# EAGLE board RedBoard-Artemis-Nano-Panel (EAGLE 9.4.2), part 1 of 7
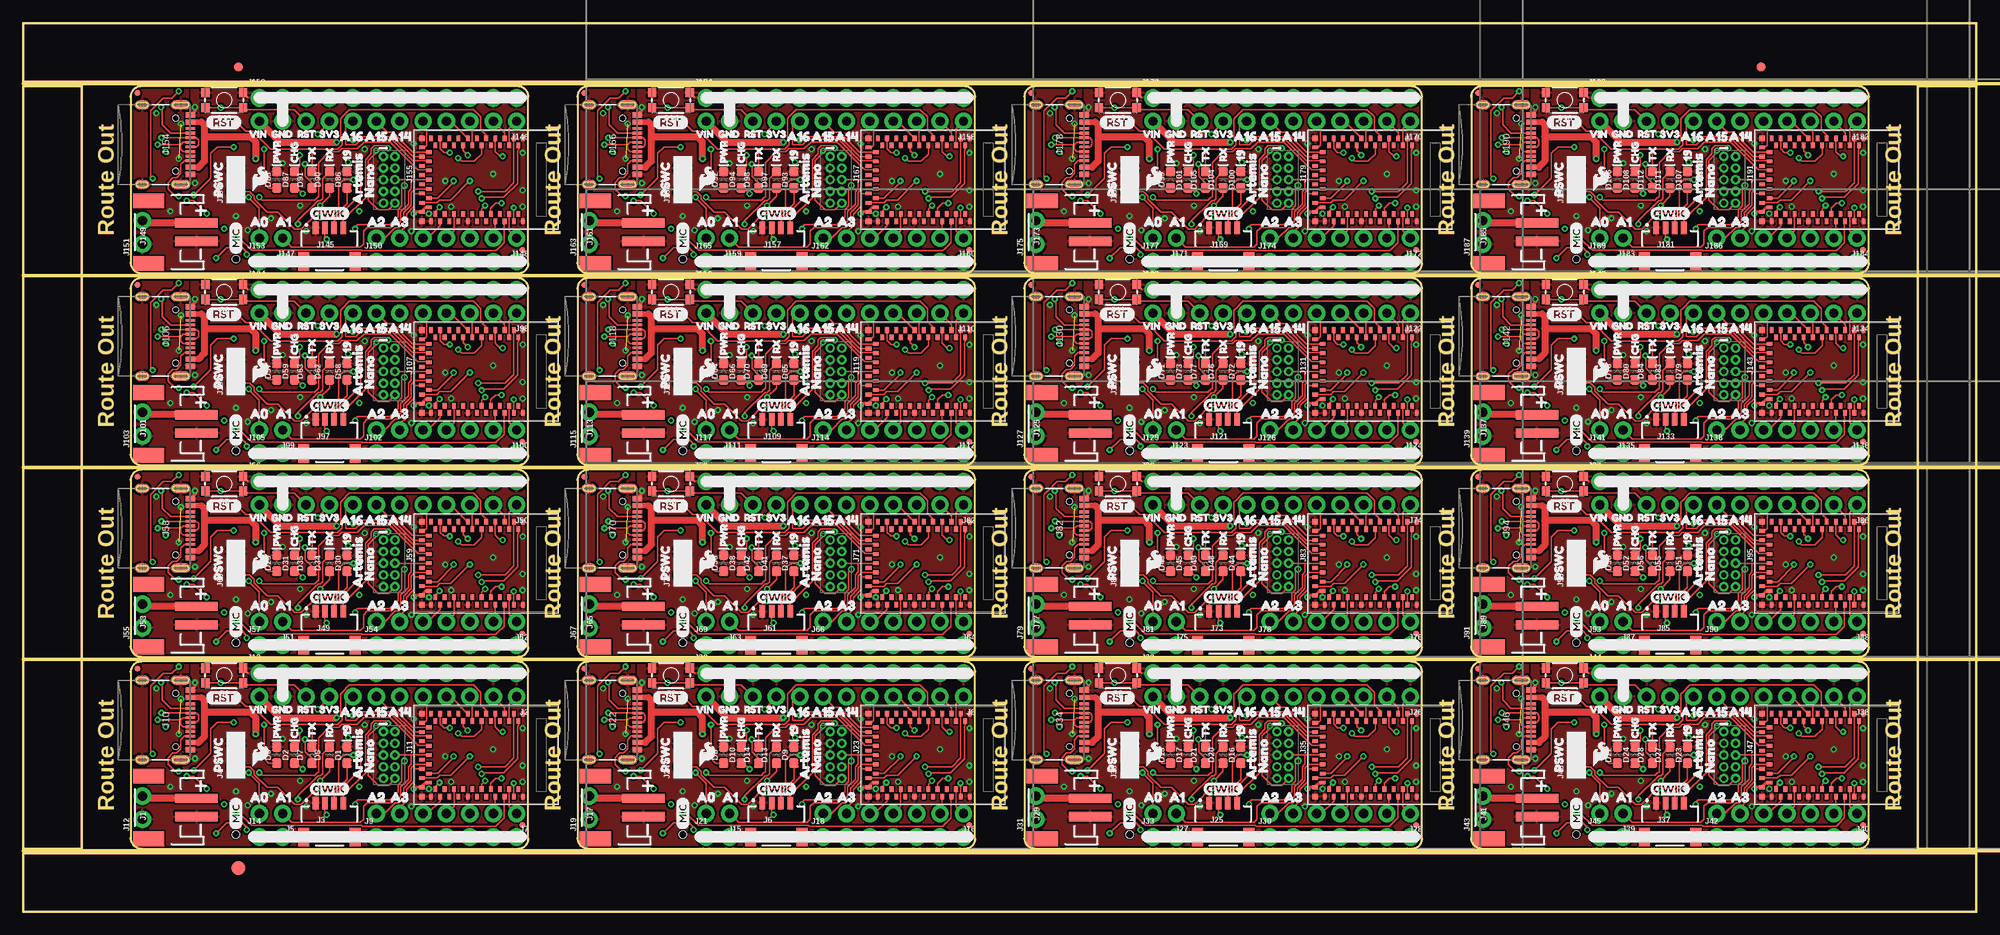
[diagram p0: board, top side]
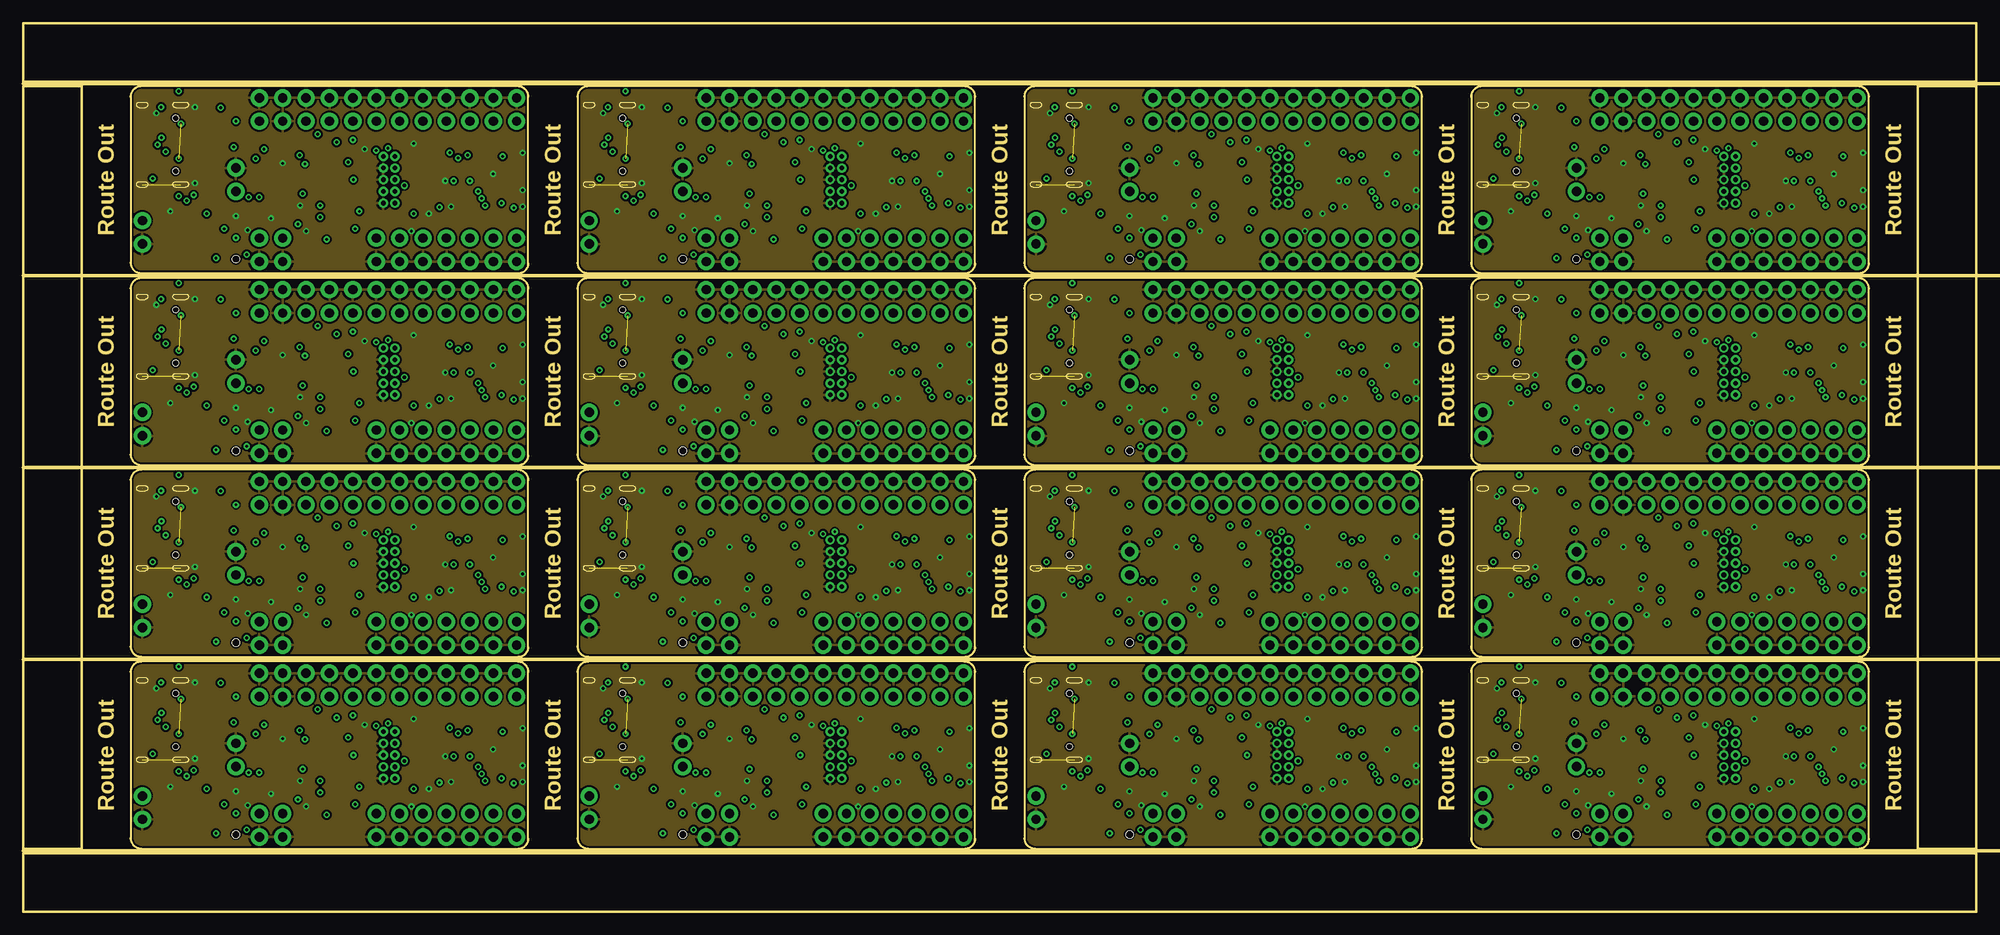
[diagram p1: board, inner layer Route2]
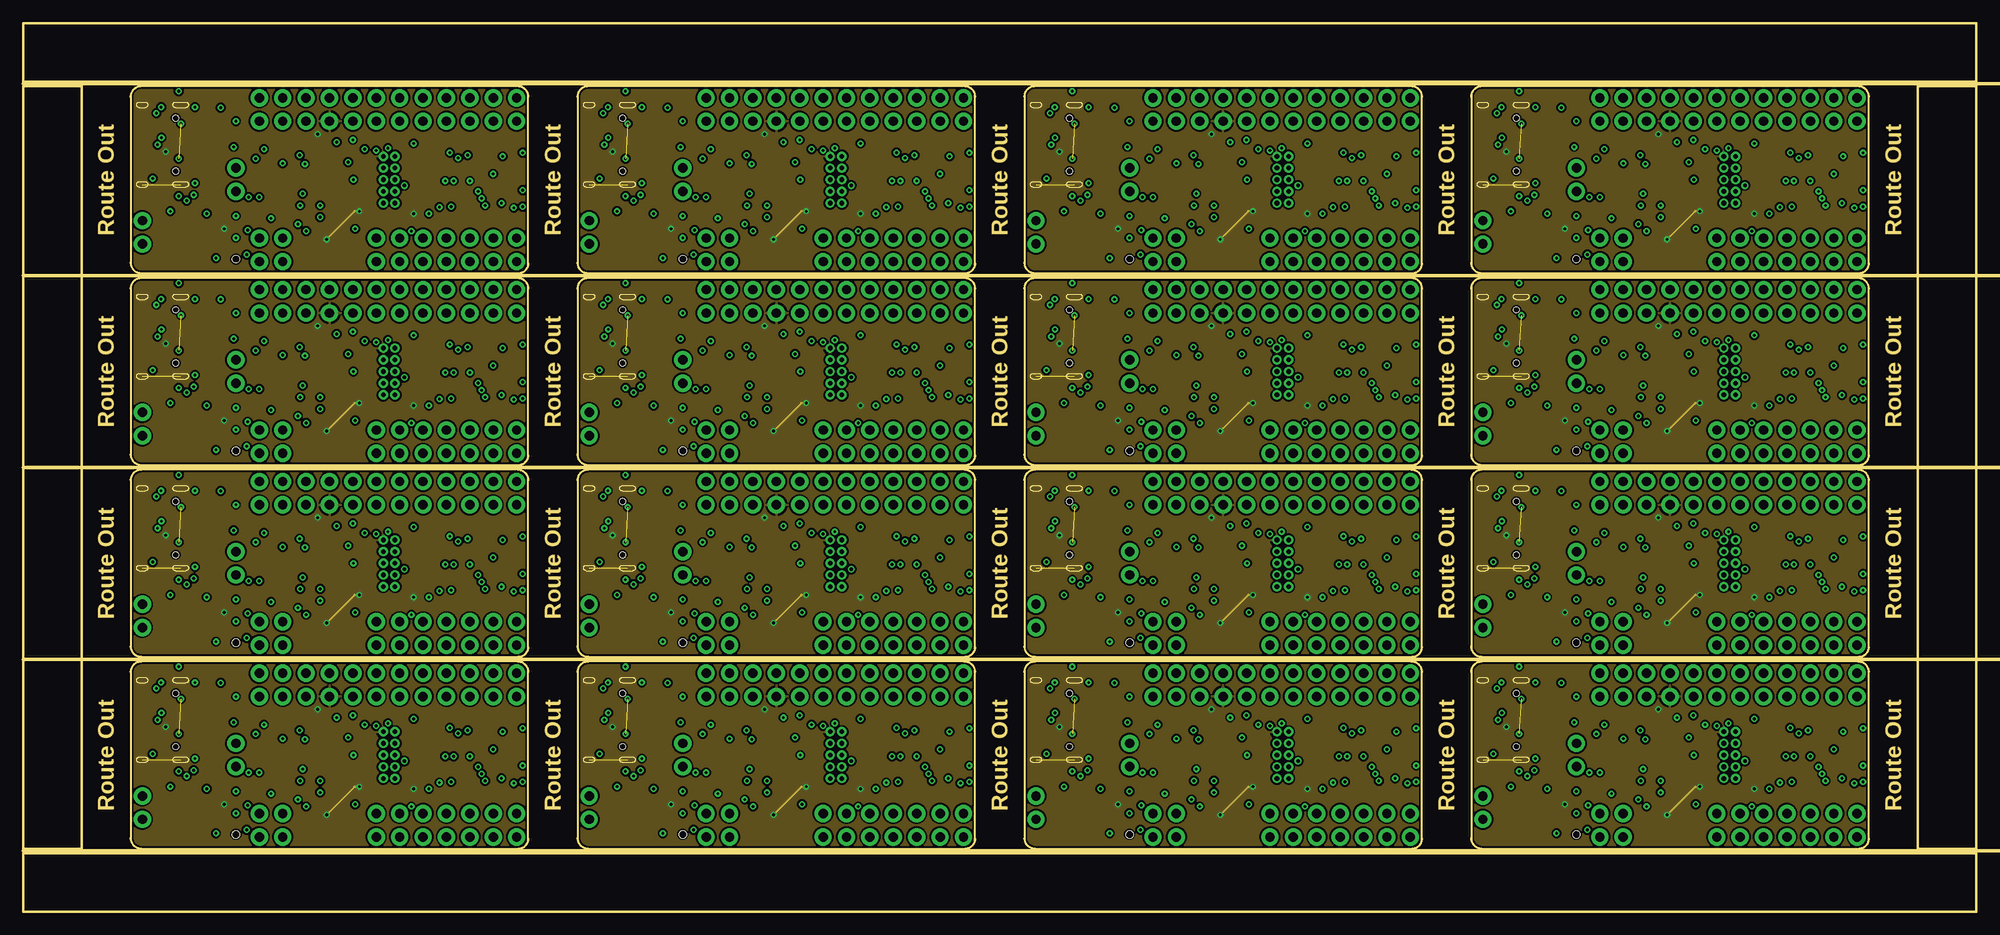
[diagram p2: board, inner layer Route15]
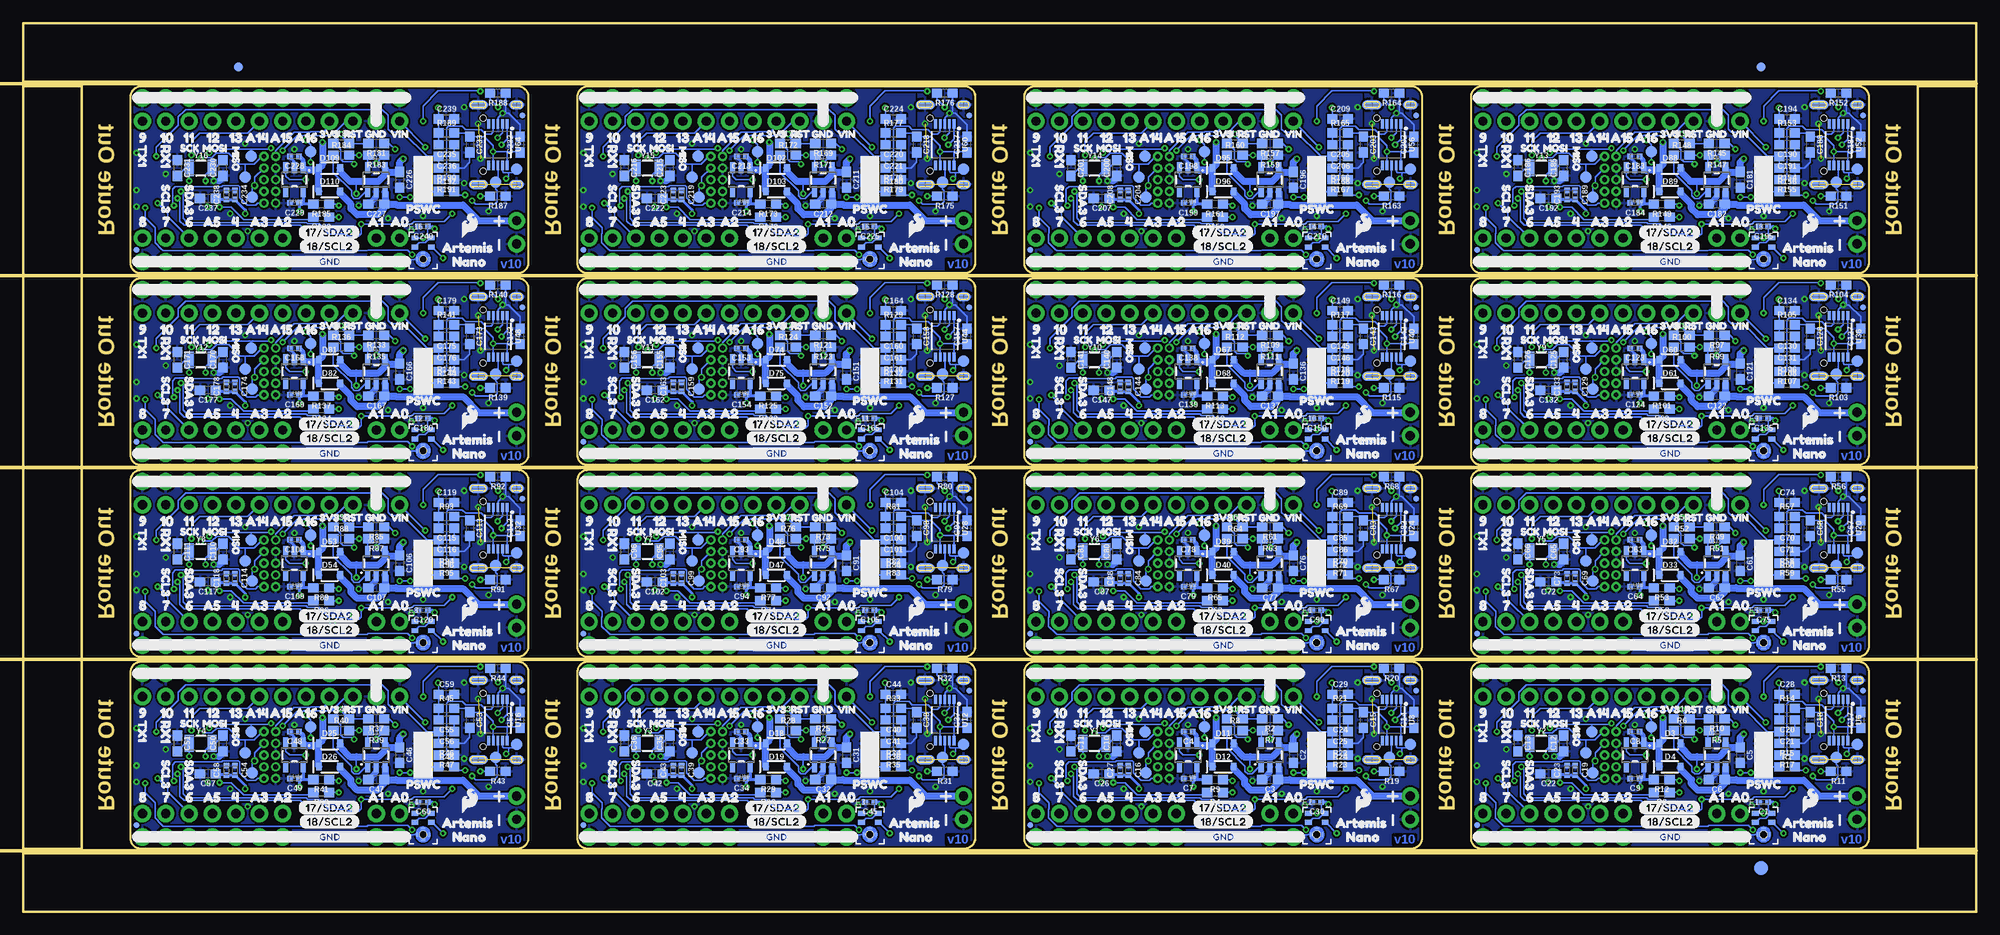
[diagram p3: board, bottom side, seen from below]

Size 212.09 x 96.52 mm. Coordinates in mm from the lower left corner, seen from the top.
Outline: 53.79,6.86 arc90 54.86,7.93 54.86,26.01 arc90 53.7,27.18 12.85,27.18 arc90 11.68,26.01 11.68,8.02 arc90 12.85,6.86 53.79,6.86
Outline: 102.3,6.86 arc90 103.38,7.93 103.38,26.01 arc90 102.21,27.18 61.36,27.18 arc90 60.2,26.01 60.2,8.02 arc90 61.36,6.86 102.3,6.86
Outline: 150.82,6.86 arc90 151.89,7.93 151.89,26.01 arc90 150.73,27.18 109.88,27.18 arc90 108.71,26.01 108.71,8.02 arc90 109.88,6.86 150.82,6.86
Outline: 199.33,6.86 arc90 200.41,7.93 200.41,26.01 arc90 199.24,27.18 158.39,27.18 arc90 157.23,26.01 157.23,8.02 arc90 158.39,6.86 199.33,6.86
Outline: 53.79,27.69 arc90 54.86,28.76 54.86,46.84 arc90 53.7,48.01 12.85,48.01 arc90 11.68,46.84 11.68,28.85 arc90 12.85,27.69 53.79,27.69
Outline: 102.3,27.69 arc90 103.38,28.76 103.38,46.84 arc90 102.21,48.01 61.36,48.01 arc90 60.2,46.84 60.2,28.85 arc90 61.36,27.69 102.3,27.69
Outline: 150.82,27.69 arc90 151.89,28.76 151.89,46.84 arc90 150.73,48.01 109.88,48.01 arc90 108.71,46.84 108.71,28.85 arc90 109.88,27.69 150.82,27.69
Outline: 199.33,27.69 arc90 200.41,28.76 200.41,46.84 arc90 199.24,48.01 158.39,48.01 arc90 157.23,46.84 157.23,28.85 arc90 158.39,27.69 199.33,27.69
Outline: 53.79,48.51 arc90 54.86,49.59 54.86,67.67 arc90 53.7,68.83 12.85,68.83 arc90 11.68,67.67 11.68,49.68 arc90 12.85,48.51 53.79,48.51
Outline: 102.3,48.51 arc90 103.38,49.59 103.38,67.67 arc90 102.21,68.83 61.36,68.83 arc90 60.2,67.67 60.2,49.68 arc90 61.36,48.51 102.3,48.51
Outline: 150.82,48.51 arc90 151.89,49.59 151.89,67.67 arc90 150.73,68.83 109.88,68.83 arc90 108.71,67.67 108.71,49.68 arc90 109.88,48.51 150.82,48.51
Outline: 199.33,48.51 arc90 200.41,49.59 200.41,67.67 arc90 199.24,68.83 158.39,68.83 arc90 157.23,67.67 157.23,49.68 arc90 158.39,48.51 199.33,48.51
Outline: 53.79,69.34 arc90 54.86,70.42 54.86,88.5 arc90 53.7,89.66 12.85,89.66 arc90 11.68,88.5 11.68,70.51 arc90 12.85,69.34 53.79,69.34
Outline: 102.3,69.34 arc90 103.38,70.42 103.38,88.5 arc90 102.21,89.66 61.36,89.66 arc90 60.2,88.5 60.2,70.51 arc90 61.36,69.34 102.3,69.34
Outline: 150.82,69.34 arc90 151.89,70.42 151.89,88.5 arc90 150.73,89.66 109.88,89.66 arc90 108.71,88.5 108.71,70.51 arc90 109.88,69.34 150.82,69.34
Outline: 199.33,69.34 arc90 200.41,70.42 200.41,88.5 arc90 199.24,89.66 158.39,89.66 arc90 157.23,88.5 157.23,70.51 arc90 158.39,69.34 199.33,69.34
Outline: 0,6.35 212.09,6.35 212.09,0 0,0 0,6.35
Outline: 205.74,89.66 212.09,89.66 212.09,6.86 205.74,6.86 205.74,89.66
Outline: 0,96.52 212.09,96.52 212.09,90.17 0,90.17 0,96.52
Outline: 0,89.66 6.35,89.66 6.35,6.86 0,6.86 0,89.66
Copper layers (1*2*15*16): Top 0.035559375mm / dielectric 0.47751875mm / Route2 0.035559375mm / dielectric 0.47751875mm / Route15 0.035559375mm / dielectric 0.47751875mm / Bottom 0.035559375mm
Design rules "SparkFun-4-layer-TIGHT": minimum track width 7mil, minimum drill 15mil, track to track 7mil, track to pad 7mil, pad to pad 7mil, via to via 7mil, smd to smd 7mil, copper to edge 7mil, drill to drill 7mil, minimum pad ring 7mil, minimum via ring 7mil, stop-mask expansion 4mil, vias tented up to drill 25mil, thermal gap 10mil
Net classes: 0 default: width 0 mm, drill 0 mm; 1 power: width 0.762 mm
Milling: 5 lines

## Footprints (pad centres in the part's own frame; a part is rotated, then mirrored left to right if it is on the bottom)
0402-TIGHT = smd 0.6 x 0.6: 1 -0.5,0; 2 0.5,0
0603 = smd 1.1 x 1: 1 -0.85,0; 2 0.85,0
LED-0603 = smd 1 x 1: A -0.877,0; C 0.877,0
SOD-323 = smd 0.63 x 0.83: A 1.15,0; C -1.15,0
SPH0641LM4H-1_MICROPHONE = smd 0.725 x 0.522: 1 -0.9,1.3; 2 -0.9,0.3; 4 0.9,0.3; 5 0.9,1.3 | smd 0.5 x 0.2: 3 0,-1.65; 8 0,-0.35 | smd 0.2 x 0.5: 6 -0.65,-1; 7 0.65,-1 | hole 0.8: 0,-1
FIDUCIAL-1X2 = smd 1 x 1: 1 0,0
FIDUCIAL-1.5X3 = smd 1.5 x 1.5: 1 0,0
FIDUCIAL-MICRO = smd 0.635 x 0.635: 1 0,0
JST-2-SMD = smd 1 x 4.6: 1 -1,-3.7; 2 1,-3.7 | smd 1.6 x 3.4: NC1 -3.4,1.5; NC2 3.4,1.5
1X12_NO_SILK = drill 1.016 pad 1.88: 1 0,0; 2 2.54,0; 3 5.08,0; 4 7.62,0; 5 10.16,0; 6 12.7,0; 7 15.24,0; 8 17.78,0; 9 20.32,0; 10 22.86,0; 11 25.4,0; 12 27.94,0
JST04_1MM_RA = smd 0.6 x 1.35: 1 -1.5,0; 2 -0.5,0; 3 0.5,0; 4 1.5,0 | smd 1.2 x 2: NC1 2.8,-3.675; NC2 -2.8,-3.675
1X02_NO_SILK = drill 1.016 pad 1.88: 1 0,0; 2 2.54,0
1X07_NO_SILK = drill 1.016 pad 1.88: 1 0,0; 2 2.54,0; 3 5.08,0; 4 7.62,0; 5 10.16,0; 6 12.7,0; 7 15.24,0
USB-C-16P-4LAYER-ISOLATED = smd 0.3 x 1.016: A5 -1.25,0.154; A6 -0.25,0.154; A7 0.25,0.154; A8 1.25,0.154; B5 1.75,0.154; B6 0.75,0.154; B7 -0.75,0.154; B8 -1.75,0.154 | smd 0.6 x 1.016: GND -3.225,0.154; GND2 3.225,0.154 | smd 1 x 2.1: SHLD1 -4.32,-0.915; SHLD2 4.32,-0.915 | smd 1 x 2.1 bottom: SHLD3 -4.32,-0.915; SHLD4 4.32,-0.915 | smd 1 x 1.6: SHLD5 -4.32,-5.095; SHLD8 4.32,-5.095 | smd 1 x 1.6 bottom: SHLD6 -4.32,-5.095; SHLD7 4.32,-5.095 | smd 0.55 x 1.016: VBUS1 -2.45,0.154; VBUS2 2.45,0.154 | hole 0.65: -2.89,-1.445; 2.89,-1.445
2X5-PTH-1.27MM-NO_SILK = drill 0.508 pad 1: 1 -2.54,-0.635; 2 -2.54,0.635; 3 -1.27,-0.635; 4 -1.27,0.635; 5 0,-0.635; 6 0,0.635; 7 1.27,-0.635; 8 1.27,0.635; 9 2.54,-0.635; 10 2.54,0.635
TACTILE_SWITCH_SMD_4.6X2.8MM = smd 0.9 x 1: 1 -2.05,-0.8; 2 2.05,-0.8; 3 2.05,0.8; 4 -2.05,0.8
PAD.03X.05 = smd 1.27 x 1.27: P$1 0,0
ARTEMIS_FP = smd 0.4 x 0.6: AD16 -4,-3.7; BOOT 1.5,4.5; D0 0.5,-4.5; D1 -0.5,-4.5; D2 -1,-3.7; D3 2,-3.7; D7 -1.5,4.5; D8 -0.5,4.5; D9 2,3.7; D10 1,3.7; D14 -5,3.7; D17 -3.5,-4.5; D36 2.5,-4.5; D38 3,-3.7; D40 2.5,4.5; D41 -2.5,-4.5; GND@1 4.5,4.5; GND@39 -5.5,-4.5; GND@47 -1.5,-4.5; GND@59 4.5,-4.5; RXI-0 3.5,4.5; SWDCK 4,3.7; SWDIO 0,3.7; TXO-0 0.5,4.5; ~AD31 -3,-3.7; ~AD35 -2,3.7; ~D4 -2.5,4.5; ~D5 -1,3.7; ~D18 -4.5,-4.5; ~D19 -5,-3.7; ~D22 -3.5,4.5; ~D23 -4,3.7; ~D24 -3,3.7; ~D27 -4.5,4.5; ~D28 -5.5,4.5; ~D37 3.5,-4.5; ~D39 3,3.7; ~D42 1.5,-4.5; ~D43 1,-3.7; ~D44 4,-3.7; ~D45 -2,-3.7; ~RST 0,-3.7 | smd 0.6 x 0.4: AD34 -6.5,-0.5; D15 -6.5,0.5; VDD@36 -5.7,-3; VDD@37 -6.5,-3.5; XI -6.5,-2.5; XO -5.7,-2; ~AD11 -5.7,-1; ~AD12 -5.7,2; ~AD13 -5.7,1; ~AD29 -6.5,-1.5; ~AD32 -5.7,3; ~AD33/SWO -5.7,0; ~D6 -6.5,3.5; ~D25 -6.5,2.5; ~D26 -6.5,1.5 | smd 0.6 x 0.6: GND@22 -6.5,4.5; GND@38 -6.5,-4.5
SOT23-5 = smd 0.55 x 1.2: 1 -0.95,-1.3; 2 0,-1.3; 3 0.95,-1.3; 4 0.95,1.3; 5 -0.95,1.3
MSOP10 = smd 1 x 0.3: 1 -2.25,1; 2 -2.25,0.5; 3 -2.25,0; 4 -2.25,-0.5; 5 -2.25,-1; 6 2.25,-1; 7 2.25,-0.5; 8 2.25,0; 9 2.25,0.5; 10 2.25,1
CRYSTAL-SMD-3.2X1.5MM = smd 1 x 1.8: P$1 -1.25,0; P$2 1.25,0

## Placement (x,y rotation side)
C1  0.1uF  [0402-TIGHT]  23.11,11.94 180 bottom
C2  4.7uF  [0603]  74.17,17.02 270 bottom
C3  4.7uF  [0603]  76.71,14.35 180 bottom
C4  1.0uF  [0402-TIGHT]  85.6,19.56 180 bottom
C5  4.7uF  [0603]  25.65,17.02 270 bottom
C6  4.7uF  [0603]  28.19,14.35 180 bottom
C7  1.0uF  [0402-TIGHT]  85.6,14.48 180 bottom
C8  1.0uF  [0402-TIGHT]  37.08,19.56 180 bottom
C9  1.0uF  [0402-TIGHT]  37.08,14.48 180 bottom
C10  15pF  [0603]  93.34,18.29 90 bottom
C11  15pF  [0603]  98.3,18.29 270 bottom
C12  15pF  [0603]  44.83,18.29 90 bottom
C13  15pF  [0603]  49.78,18.29 270 bottom
C14  10nF  [0603]  61.09,20.83 90 bottom
C15  0.1uF  [0603]  66.55,20.83 270 bottom
C16  0.1uF  [0402-TIGHT]  92.08,15.37 270 bottom
C17  10nF  [0603]  12.57,20.83 90 bottom
C18  0.1uF  [0603]  18.03,20.83 270 bottom
C19  0.1uF  [0402-TIGHT]  43.56,15.37 270 bottom
C20  0.1uF  [0603]  20.57,20.83 180 bottom
C21  0.1uF  [0603]  20.57,19.56 180 bottom
C22  10uF  [0603]  46.48,14.99 180 bottom
C23  1.0uF  [0402-TIGHT]  44.45,15.37 90 bottom
C24  0.1uF  [0603]  69.09,20.83 180 bottom
C25  0.1uF  [0603]  69.09,19.56 180 bottom
C26  10uF  [0603]  95,14.99 180 bottom
C27  1.0uF  [0402-TIGHT]  92.96,15.37 90 bottom
C28  1nF  [0603]  20.57,23.62 0 bottom
C29  1nF  [0603]  69.09,23.62 0 bottom
C30  0.1uF  [0402-TIGHT]  71.63,11.94 180 bottom
C31  4.7uF  [0603]  122.68,17.02 270 bottom
C32  4.7uF  [0603]  125.22,14.35 180 bottom
C33  1.0uF  [0402-TIGHT]  134.11,19.56 180 bottom
C34  1.0uF  [0402-TIGHT]  134.11,14.48 180 bottom
C35  15pF  [0603]  141.86,18.29 90 bottom
C36  15pF  [0603]  146.81,18.29 270 bottom
C37  10nF  [0603]  109.6,20.83 90 bottom
C38  0.1uF  [0603]  115.06,20.83 270 bottom
C39  0.1uF  [0402-TIGHT]  140.59,15.37 270 bottom
C40  0.1uF  [0603]  117.6,20.83 180 bottom
C41  0.1uF  [0603]  117.6,19.56 180 bottom
C42  10uF  [0603]  143.51,14.99 180 bottom
C43  1.0uF  [0402-TIGHT]  141.48,15.37 90 bottom
C44  1nF  [0603]  117.6,23.62 0 bottom
C45  0.1uF  [0402-TIGHT]  120.14,11.94 180 bottom
C46  4.7uF  [0603]  171.2,17.02 270 bottom
C47  4.7uF  [0603]  173.74,14.35 180 bottom
C48  1.0uF  [0402-TIGHT]  182.63,19.56 180 bottom
C49  1.0uF  [0402-TIGHT]  182.63,14.48 180 bottom
C50  15pF  [0603]  190.37,18.29 90 bottom
C51  15pF  [0603]  195.33,18.29 270 bottom
C52  10nF  [0603]  158.12,20.83 90 bottom
C53  0.1uF  [0603]  163.58,20.83 270 bottom
C54  0.1uF  [0402-TIGHT]  189.1,15.37 270 bottom
C55  0.1uF  [0603]  166.12,20.83 180 bottom
C56  0.1uF  [0603]  166.12,19.56 180 bottom
C57  10uF  [0603]  192.02,14.99 180 bottom
C58  1.0uF  [0402-TIGHT]  189.99,15.37 90 bottom
C59  1nF  [0603]  166.12,23.62 0 bottom
C60  0.1uF  [0402-TIGHT]  168.66,11.94 180 bottom
C61  4.7uF  [0603]  25.65,37.85 270 bottom
C62  4.7uF  [0603]  28.19,35.18 180 bottom
C63  1.0uF  [0402-TIGHT]  37.08,40.39 180 bottom
C64  1.0uF  [0402-TIGHT]  37.08,35.31 180 bottom
C65  15pF  [0603]  44.83,39.12 90 bottom
C66  15pF  [0603]  49.78,39.12 270 bottom
C67  10nF  [0603]  12.57,41.66 90 bottom
C68  0.1uF  [0603]  18.03,41.66 270 bottom
C69  0.1uF  [0402-TIGHT]  43.56,36.2 270 bottom
C70  0.1uF  [0603]  20.57,41.66 180 bottom
C71  0.1uF  [0603]  20.57,40.39 180 bottom
C72  10uF  [0603]  46.48,35.81 180 bottom
C73  1.0uF  [0402-TIGHT]  44.45,36.2 90 bottom
C74  1nF  [0603]  20.57,44.45 0 bottom
C75  0.1uF  [0402-TIGHT]  23.11,32.77 180 bottom
C76  4.7uF  [0603]  74.17,37.85 270 bottom
C77  4.7uF  [0603]  76.71,35.18 180 bottom
C78  1.0uF  [0402-TIGHT]  85.6,40.39 180 bottom
C79  1.0uF  [0402-TIGHT]  85.6,35.31 180 bottom
C80  15pF  [0603]  93.34,39.12 90 bottom
C81  15pF  [0603]  98.3,39.12 270 bottom
C82  10nF  [0603]  61.09,41.66 90 bottom
C83  0.1uF  [0603]  66.55,41.66 270 bottom
C84  0.1uF  [0402-TIGHT]  92.08,36.2 270 bottom
C85  0.1uF  [0603]  69.09,41.66 180 bottom
C86  0.1uF  [0603]  69.09,40.39 180 bottom
C87  10uF  [0603]  95,35.81 180 bottom
C88  1.0uF  [0402-TIGHT]  92.96,36.2 90 bottom
C89  1nF  [0603]  69.09,44.45 0 bottom
C90  0.1uF  [0402-TIGHT]  71.63,32.77 180 bottom
C91  4.7uF  [0603]  122.68,37.85 270 bottom
C92  4.7uF  [0603]  125.22,35.18 180 bottom
C93  1.0uF  [0402-TIGHT]  134.11,40.39 180 bottom
C94  1.0uF  [0402-TIGHT]  134.11,35.31 180 bottom
C95  15pF  [0603]  141.86,39.12 90 bottom
C96  15pF  [0603]  146.81,39.12 270 bottom
C97  10nF  [0603]  109.6,41.66 90 bottom
C98  0.1uF  [0603]  115.06,41.66 270 bottom
C99  0.1uF  [0402-TIGHT]  140.59,36.2 270 bottom
C100  0.1uF  [0603]  117.6,41.66 180 bottom
C101  0.1uF  [0603]  117.6,40.39 180 bottom
C102  10uF  [0603]  143.51,35.81 180 bottom
C103  1.0uF  [0402-TIGHT]  141.48,36.2 90 bottom
C104  1nF  [0603]  117.6,44.45 0 bottom
C105  0.1uF  [0402-TIGHT]  120.14,32.77 180 bottom
C106  4.7uF  [0603]  171.2,37.85 270 bottom
C107  4.7uF  [0603]  173.74,35.18 180 bottom
C108  1.0uF  [0402-TIGHT]  182.63,40.39 180 bottom
C109  1.0uF  [0402-TIGHT]  182.63,35.31 180 bottom
C110  15pF  [0603]  190.37,39.12 90 bottom
C111  15pF  [0603]  195.33,39.12 270 bottom
C112  10nF  [0603]  158.12,41.66 90 bottom
C113  0.1uF  [0603]  163.58,41.66 270 bottom
C114  0.1uF  [0402-TIGHT]  189.1,36.2 270 bottom
C115  0.1uF  [0603]  166.12,41.66 180 bottom
C116  0.1uF  [0603]  166.12,40.39 180 bottom
C117  10uF  [0603]  192.02,35.81 180 bottom
C118  1.0uF  [0402-TIGHT]  189.99,36.2 90 bottom
C119  1nF  [0603]  166.12,44.45 0 bottom
C120  0.1uF  [0402-TIGHT]  168.66,32.77 180 bottom
C121  4.7uF  [0603]  25.65,58.67 270 bottom
C122  4.7uF  [0603]  28.19,56.01 180 bottom
C123  1.0uF  [0402-TIGHT]  37.08,61.21 180 bottom
C124  1.0uF  [0402-TIGHT]  37.08,56.13 180 bottom
C125  15pF  [0603]  44.83,59.94 90 bottom
C126  15pF  [0603]  49.78,59.94 270 bottom
C127  10nF  [0603]  12.57,62.48 90 bottom
C128  0.1uF  [0603]  18.03,62.48 270 bottom
C129  0.1uF  [0402-TIGHT]  43.56,57.02 270 bottom
C130  0.1uF  [0603]  20.57,62.48 180 bottom
C131  0.1uF  [0603]  20.57,61.21 180 bottom
C132  10uF  [0603]  46.48,56.64 180 bottom
C133  1.0uF  [0402-TIGHT]  44.45,57.02 90 bottom
C134  1nF  [0603]  20.57,65.28 0 bottom
C135  0.1uF  [0402-TIGHT]  23.11,53.59 180 bottom
C136  4.7uF  [0603]  74.17,58.67 270 bottom
C137  4.7uF  [0603]  76.71,56.01 180 bottom
C138  1.0uF  [0402-TIGHT]  85.6,61.21 180 bottom
C139  1.0uF  [0402-TIGHT]  85.6,56.13 180 bottom
C140  15pF  [0603]  93.34,59.94 90 bottom
C141  15pF  [0603]  98.3,59.94 270 bottom
C142  10nF  [0603]  61.09,62.48 90 bottom
C143  0.1uF  [0603]  66.55,62.48 270 bottom
C144  0.1uF  [0402-TIGHT]  92.08,57.02 270 bottom
C145  0.1uF  [0603]  69.09,62.48 180 bottom
C146  0.1uF  [0603]  69.09,61.21 180 bottom
C147  10uF  [0603]  95,56.64 180 bottom
C148  1.0uF  [0402-TIGHT]  92.96,57.02 90 bottom
C149  1nF  [0603]  69.09,65.28 0 bottom
C150  0.1uF  [0402-TIGHT]  71.63,53.59 180 bottom
C151  4.7uF  [0603]  122.68,58.67 270 bottom
C152  4.7uF  [0603]  125.22,56.01 180 bottom
C153  1.0uF  [0402-TIGHT]  134.11,61.21 180 bottom
C154  1.0uF  [0402-TIGHT]  134.11,56.13 180 bottom
C155  15pF  [0603]  141.86,59.94 90 bottom
C156  15pF  [0603]  146.81,59.94 270 bottom
C157  10nF  [0603]  109.6,62.48 90 bottom
C158  0.1uF  [0603]  115.06,62.48 270 bottom
C159  0.1uF  [0402-TIGHT]  140.59,57.02 270 bottom
C160  0.1uF  [0603]  117.6,62.48 180 bottom
C161  0.1uF  [0603]  117.6,61.21 180 bottom
C162  10uF  [0603]  143.51,56.64 180 bottom
C163  1.0uF  [0402-TIGHT]  141.48,57.02 90 bottom
C164  1nF  [0603]  117.6,65.28 0 bottom
C165  0.1uF  [0402-TIGHT]  120.14,53.59 180 bottom
C166  4.7uF  [0603]  171.2,58.67 270 bottom
C167  4.7uF  [0603]  173.74,56.01 180 bottom
C168  1.0uF  [0402-TIGHT]  182.63,61.21 180 bottom
C169  1.0uF  [0402-TIGHT]  182.63,56.13 180 bottom
C170  15pF  [0603]  190.37,59.94 90 bottom
C171  15pF  [0603]  195.33,59.94 270 bottom
C172  10nF  [0603]  158.12,62.48 90 bottom
C173  0.1uF  [0603]  163.58,62.48 270 bottom
C174  0.1uF  [0402-TIGHT]  189.1,57.02 270 bottom
C175  0.1uF  [0603]  166.12,62.48 180 bottom
C176  0.1uF  [0603]  166.12,61.21 180 bottom
C177  10uF  [0603]  192.02,56.64 180 bottom
C178  1.0uF  [0402-TIGHT]  189.99,57.02 90 bottom
C179  1nF  [0603]  166.12,65.28 0 bottom
C180  0.1uF  [0402-TIGHT]  168.66,53.59 180 bottom
C181  4.7uF  [0603]  25.65,79.5 270 bottom
C182  4.7uF  [0603]  28.19,76.84 180 bottom
C183  1.0uF  [0402-TIGHT]  37.08,82.04 180 bottom
C184  1.0uF  [0402-TIGHT]  37.08,76.96 180 bottom
C185  15pF  [0603]  44.83,80.77 90 bottom
C186  15pF  [0603]  49.78,80.77 270 bottom
C187  10nF  [0603]  12.57,83.31 90 bottom
C188  0.1uF  [0603]  18.03,83.31 270 bottom
C189  0.1uF  [0402-TIGHT]  43.56,77.85 270 bottom
C190  0.1uF  [0603]  20.57,83.31 180 bottom
C191  0.1uF  [0603]  20.57,82.04 180 bottom
C192  10uF  [0603]  46.48,77.47 180 bottom
C193  1.0uF  [0402-TIGHT]  44.45,77.85 90 bottom
C194  1nF  [0603]  20.57,86.11 0 bottom
C195  0.1uF  [0402-TIGHT]  23.11,74.42 180 bottom
C196  4.7uF  [0603]  74.17,79.5 270 bottom
C197  4.7uF  [0603]  76.71,76.84 180 bottom
C198  1.0uF  [0402-TIGHT]  85.6,82.04 180 bottom
C199  1.0uF  [0402-TIGHT]  85.6,76.96 180 bottom
C200  15pF  [0603]  93.34,80.77 90 bottom
C201  15pF  [0603]  98.3,80.77 270 bottom
C202  10nF  [0603]  61.09,83.31 90 bottom
C203  0.1uF  [0603]  66.55,83.31 270 bottom
C204  0.1uF  [0402-TIGHT]  92.08,77.85 270 bottom
C205  0.1uF  [0603]  69.09,83.31 180 bottom
C206  0.1uF  [0603]  69.09,82.04 180 bottom
C207  10uF  [0603]  95,77.47 180 bottom
C208  1.0uF  [0402-TIGHT]  92.96,77.85 90 bottom
C209  1nF  [0603]  69.09,86.11 0 bottom
C210  0.1uF  [0402-TIGHT]  71.63,74.42 180 bottom
C211  4.7uF  [0603]  122.68,79.5 270 bottom
C212  4.7uF  [0603]  125.22,76.84 180 bottom
C213  1.0uF  [0402-TIGHT]  134.11,82.04 180 bottom
C214  1.0uF  [0402-TIGHT]  134.11,76.96 180 bottom
C215  15pF  [0603]  141.86,80.77 90 bottom
C216  15pF  [0603]  146.81,80.77 270 bottom
C217  10nF  [0603]  109.6,83.31 90 bottom
C218  0.1uF  [0603]  115.06,83.31 270 bottom
C219  0.1uF  [0402-TIGHT]  140.59,77.85 270 bottom
C220  0.1uF  [0603]  117.6,83.31 180 bottom
C221  0.1uF  [0603]  117.6,82.04 180 bottom
C222  10uF  [0603]  143.51,77.47 180 bottom
C223  1.0uF  [0402-TIGHT]  141.48,77.85 90 bottom
C224  1nF  [0603]  117.6,86.11 0 bottom
C225  0.1uF  [0402-TIGHT]  120.14,74.42 180 bottom
C226  4.7uF  [0603]  171.2,79.5 270 bottom
C227  4.7uF  [0603]  173.74,76.84 180 bottom
C228  1.0uF  [0402-TIGHT]  182.63,82.04 180 bottom
C229  1.0uF  [0402-TIGHT]  182.63,76.96 180 bottom
C230  15pF  [0603]  190.37,80.77 90 bottom
C231  15pF  [0603]  195.33,80.77 270 bottom
C232  10nF  [0603]  158.12,83.31 90 bottom
C233  0.1uF  [0603]  163.58,83.31 270 bottom
C234  0.1uF  [0402-TIGHT]  189.1,77.85 270 bottom
C235  0.1uF  [0603]  166.12,83.31 180 bottom
C236  0.1uF  [0603]  166.12,82.04 180 bottom
C237  10uF  [0603]  192.02,77.47 180 bottom
C238  1.0uF  [0402-TIGHT]  189.99,77.85 90 bottom
C239  1nF  [0603]  166.12,86.11 0 bottom
C240  0.1uF  [0402-TIGHT]  168.66,74.42 180 bottom
D1  BLUE  [LED-0603]  35.18,17.02 90 top
D2  Yellow  [LED-0603]  29.46,17.02 90 top
D3  1A/23V/620mV  [SOD-323]  33.27,18.29 0 bottom
D4  1A/23V/620mV  [SOD-323]  33.27,15.75 0 bottom
D5  Yellow  [LED-0603]  33.27,17.02 90 top
D6  RED  [LED-0603]  27.56,17.02 90 top
D7  GREEN  [LED-0603]  31.37,17.02 90 top
D8  RED  [LED-0603]  76.07,17.02 90 top
D9  BLUE  [LED-0603]  83.69,17.02 90 top
D10  Yellow  [LED-0603]  77.98,17.02 90 top
D11  1A/23V/620mV  [SOD-323]  81.79,18.29 0 bottom
D12  1A/23V/620mV  [SOD-323]  81.79,15.75 0 bottom
D13  Yellow  [LED-0603]  81.79,17.02 90 top
D14  GREEN  [LED-0603]  79.88,17.02 90 top
D15  RED  [LED-0603]  124.59,17.02 90 top
D16  BLUE  [LED-0603]  132.21,17.02 90 top
D17  Yellow  [LED-0603]  126.49,17.02 90 top
D18  1A/23V/620mV  [SOD-323]  130.3,18.29 0 bottom
D19  1A/23V/620mV  [SOD-323]  130.3,15.75 0 bottom
D20  Yellow  [LED-0603]  130.3,17.02 90 top
D21  GREEN  [LED-0603]  128.4,17.02 90 top
D22  RED  [LED-0603]  173.1,17.02 90 top
D23  BLUE  [LED-0603]  180.72,17.02 90 top
D24  Yellow  [LED-0603]  175.01,17.02 90 top
D25  1A/23V/620mV  [SOD-323]  178.82,18.29 0 bottom
D26  1A/23V/620mV  [SOD-323]  178.82,15.75 0 bottom
D27  Yellow  [LED-0603]  178.82,17.02 90 top
D28  GREEN  [LED-0603]  176.91,17.02 90 top
D29  RED  [LED-0603]  27.56,37.85 90 top
D30  BLUE  [LED-0603]  35.18,37.85 90 top
D31  Yellow  [LED-0603]  29.46,37.85 90 top
D32  1A/23V/620mV  [SOD-323]  33.27,39.12 0 bottom
D33  1A/23V/620mV  [SOD-323]  33.27,36.58 0 bottom
D34  Yellow  [LED-0603]  33.27,37.85 90 top
D35  GREEN  [LED-0603]  31.37,37.85 90 top
D36  RED  [LED-0603]  76.07,37.85 90 top
D37  BLUE  [LED-0603]  83.69,37.85 90 top
D38  Yellow  [LED-0603]  77.98,37.85 90 top
D39  1A/23V/620mV  [SOD-323]  81.79,39.12 0 bottom
D40  1A/23V/620mV  [SOD-323]  81.79,36.58 0 bottom
D41  Yellow  [LED-0603]  81.79,37.85 90 top
D42  GREEN  [LED-0603]  79.88,37.85 90 top
D43  RED  [LED-0603]  124.59,37.85 90 top
D44  BLUE  [LED-0603]  132.21,37.85 90 top
D45  Yellow  [LED-0603]  126.49,37.85 90 top
D46  1A/23V/620mV  [SOD-323]  130.3,39.12 0 bottom
D47  1A/23V/620mV  [SOD-323]  130.3,36.58 0 bottom
D48  Yellow  [LED-0603]  130.3,37.85 90 top
D49  GREEN  [LED-0603]  128.4,37.85 90 top
D50  RED  [LED-0603]  173.1,37.85 90 top
D51  BLUE  [LED-0603]  180.72,37.85 90 top
D52  Yellow  [LED-0603]  175.01,37.85 90 top
D53  1A/23V/620mV  [SOD-323]  178.82,39.12 0 bottom
D54  1A/23V/620mV  [SOD-323]  178.82,36.58 0 bottom
D55  Yellow  [LED-0603]  178.82,37.85 90 top
D56  GREEN  [LED-0603]  176.91,37.85 90 top
D57  RED  [LED-0603]  27.56,58.67 90 top
D58  BLUE  [LED-0603]  35.18,58.67 90 top
D59  Yellow  [LED-0603]  29.46,58.67 90 top
D60  1A/23V/620mV  [SOD-323]  33.27,59.94 0 bottom
D61  1A/23V/620mV  [SOD-323]  33.27,57.4 0 bottom
D62  Yellow  [LED-0603]  33.27,58.67 90 top
D63  GREEN  [LED-0603]  31.37,58.67 90 top
D64  RED  [LED-0603]  76.07,58.67 90 top
D65  BLUE  [LED-0603]  83.69,58.67 90 top
D66  Yellow  [LED-0603]  77.98,58.67 90 top
D67  1A/23V/620mV  [SOD-323]  81.79,59.94 0 bottom
D68  1A/23V/620mV  [SOD-323]  81.79,57.4 0 bottom
D69  Yellow  [LED-0603]  81.79,58.67 90 top
D70  GREEN  [LED-0603]  79.88,58.67 90 top
D71  RED  [LED-0603]  124.59,58.67 90 top
D72  BLUE  [LED-0603]  132.21,58.67 90 top
D73  Yellow  [LED-0603]  126.49,58.67 90 top
D74  1A/23V/620mV  [SOD-323]  130.3,59.94 0 bottom
D75  1A/23V/620mV  [SOD-323]  130.3,57.4 0 bottom
D76  Yellow  [LED-0603]  130.3,58.67 90 top
D77  GREEN  [LED-0603]  128.4,58.67 90 top
D78  RED  [LED-0603]  173.1,58.67 90 top
D79  BLUE  [LED-0603]  180.72,58.67 90 top
D80  Yellow  [LED-0603]  175.01,58.67 90 top
D81  1A/23V/620mV  [SOD-323]  178.82,59.94 0 bottom
D82  1A/23V/620mV  [SOD-323]  178.82,57.4 0 bottom
D83  Yellow  [LED-0603]  178.82,58.67 90 top
D84  GREEN  [LED-0603]  176.91,58.67 90 top
D85  RED  [LED-0603]  27.56,79.5 90 top
D86  BLUE  [LED-0603]  35.18,79.5 90 top
D87  Yellow  [LED-0603]  29.46,79.5 90 top
D88  1A/23V/620mV  [SOD-323]  33.27,80.77 0 bottom
D89  1A/23V/620mV  [SOD-323]  33.27,78.23 0 bottom
D90  Yellow  [LED-0603]  33.27,79.5 90 top
D91  GREEN  [LED-0603]  31.37,79.5 90 top
D92  RED  [LED-0603]  76.07,79.5 90 top
D93  BLUE  [LED-0603]  83.69,79.5 90 top
D94  Yellow  [LED-0603]  77.98,79.5 90 top
D95  1A/23V/620mV  [SOD-323]  81.79,80.77 0 bottom
D96  1A/23V/620mV  [SOD-323]  81.79,78.23 0 bottom
D97  Yellow  [LED-0603]  81.79,79.5 90 top
D98  GREEN  [LED-0603]  79.88,79.5 90 top
D99  RED  [LED-0603]  124.59,79.5 90 top
D100  BLUE  [LED-0603]  132.21,79.5 90 top
D101  Yellow  [LED-0603]  126.49,79.5 90 top
D102  1A/23V/620mV  [SOD-323]  130.3,80.77 0 bottom
D103  1A/23V/620mV  [SOD-323]  130.3,78.23 0 bottom
D104  Yellow  [LED-0603]  130.3,79.5 90 top
D105  GREEN  [LED-0603]  128.4,79.5 90 top
D106  RED  [LED-0603]  173.1,79.5 90 top
D107  BLUE  [LED-0603]  180.72,79.5 90 top
D108  Yellow  [LED-0603]  175.01,79.5 90 top
D109  1A/23V/620mV  [SOD-323]  178.82,80.77 0 bottom
D110  1A/23V/620mV  [SOD-323]  178.82,78.23 0 bottom
D111  Yellow  [LED-0603]  178.82,79.5 90 top
D112  GREEN  [LED-0603]  176.91,79.5 90 top
E1  SPH0641LM4H  [SPH0641LM4H-1_MICROPHONE]  23.11,9.4 0 bottom
E2  SPH0641LM4H  [SPH0641LM4H-1_MICROPHONE]  71.63,9.4 0 bottom
E3  SPH0641LM4H  [SPH0641LM4H-1_MICROPHONE]  120.14,9.4 0 bottom
E4  SPH0641LM4H  [SPH0641LM4H-1_MICROPHONE]  168.66,9.4 0 bottom
E5  SPH0641LM4H  [SPH0641LM4H-1_MICROPHONE]  23.11,30.23 0 bottom
E6  SPH0641LM4H  [SPH0641LM4H-1_MICROPHONE]  71.63,30.23 0 bottom
E7  SPH0641LM4H  [SPH0641LM4H-1_MICROPHONE]  120.14,30.23 0 bottom
E8  SPH0641LM4H  [SPH0641LM4H-1_MICROPHONE]  168.66,30.23 0 bottom
E9  SPH0641LM4H  [SPH0641LM4H-1_MICROPHONE]  23.11,51.05 0 bottom
E10  SPH0641LM4H  [SPH0641LM4H-1_MICROPHONE]  71.63,51.05 0 bottom
E11  SPH0641LM4H  [SPH0641LM4H-1_MICROPHONE]  120.14,51.05 0 bottom
E12  SPH0641LM4H  [SPH0641LM4H-1_MICROPHONE]  168.66,51.05 0 bottom
E13  SPH0641LM4H  [SPH0641LM4H-1_MICROPHONE]  23.11,71.88 0 bottom
E14  SPH0641LM4H  [SPH0641LM4H-1_MICROPHONE]  71.63,71.88 0 bottom
E15  SPH0641LM4H  [SPH0641LM4H-1_MICROPHONE]  120.14,71.88 0 bottom
E16  SPH0641LM4H  [SPH0641LM4H-1_MICROPHONE]  168.66,71.88 0 bottom
E$1  [FIDUCIAL-1X2]  23.37,91.76 0 top
E$2  [FIDUCIAL-1X2]  23.37,91.76 0 bottom
E$3  [FIDUCIAL-1X2]  188.72,91.76 0 top
E$4  [FIDUCIAL-1X2]  188.72,91.76 0 bottom
E$5  [FIDUCIAL-1.5X3]  23.37,4.76 0 top
E$6  [FIDUCIAL-1.5X3]  23.37,4.76 0 bottom
FD1  FIDUCIALUFIDUCIAL  [FIDUCIAL-MICRO]  54.23,9.4 0 top
FD2  FIDUCIALUFIDUCIAL  [FIDUCIAL-MICRO]  12.45,26.42 0 top
FD3  FIDUCIALUFIDUCIAL  [FIDUCIAL-MICRO]  12.32,24 0 bottom
FD4  FIDUCIALUFIDUCIAL  [FIDUCIAL-MICRO]  54.23,9.4 0 bottom
FD5  FIDUCIALUFIDUCIAL  [FIDUCIAL-MICRO]  102.74,9.4 0 top
FD6  FIDUCIALUFIDUCIAL  [FIDUCIAL-MICRO]  60.96,26.42 0 top
FD7  FIDUCIALUFIDUCIAL  [FIDUCIAL-MICRO]  60.83,24 0 bottom
FD8  FIDUCIALUFIDUCIAL  [FIDUCIAL-MICRO]  102.74,9.4 0 bottom
FD9  FIDUCIALUFIDUCIAL  [FIDUCIAL-MICRO]  151.26,9.4 0 top
FD10  FIDUCIALUFIDUCIAL  [FIDUCIAL-MICRO]  109.47,26.42 0 top
FD11  FIDUCIALUFIDUCIAL  [FIDUCIAL-MICRO]  109.35,24 0 bottom
FD12  FIDUCIALUFIDUCIAL  [FIDUCIAL-MICRO]  151.26,9.4 0 bottom
FD13  FIDUCIALUFIDUCIAL  [FIDUCIAL-MICRO]  199.77,9.4 0 top
FD14  FIDUCIALUFIDUCIAL  [FIDUCIAL-MICRO]  157.99,26.42 0 top
FD15  FIDUCIALUFIDUCIAL  [FIDUCIAL-MICRO]  157.86,24 0 bottom
FD16  FIDUCIALUFIDUCIAL  [FIDUCIAL-MICRO]  199.77,9.4 0 bottom
FD17  FIDUCIALUFIDUCIAL  [FIDUCIAL-MICRO]  54.23,30.23 0 top
FD18  FIDUCIALUFIDUCIAL  [FIDUCIAL-MICRO]  12.45,47.24 0 top
FD19  FIDUCIALUFIDUCIAL  [FIDUCIAL-MICRO]  12.32,44.83 0 bottom
FD20  FIDUCIALUFIDUCIAL  [FIDUCIAL-MICRO]  54.23,30.23 0 bottom
FD21  FIDUCIALUFIDUCIAL  [FIDUCIAL-MICRO]  102.74,30.23 0 top
FD22  FIDUCIALUFIDUCIAL  [FIDUCIAL-MICRO]  60.96,47.24 0 top
FD23  FIDUCIALUFIDUCIAL  [FIDUCIAL-MICRO]  60.83,44.83 0 bottom
FD24  FIDUCIALUFIDUCIAL  [FIDUCIAL-MICRO]  102.74,30.23 0 bottom
FD25  FIDUCIALUFIDUCIAL  [FIDUCIAL-MICRO]  151.26,30.23 0 top
FD26  FIDUCIALUFIDUCIAL  [FIDUCIAL-MICRO]  109.47,47.24 0 top
FD27  FIDUCIALUFIDUCIAL  [FIDUCIAL-MICRO]  109.35,44.83 0 bottom
FD28  FIDUCIALUFIDUCIAL  [FIDUCIAL-MICRO]  151.26,30.23 0 bottom
FD29  FIDUCIALUFIDUCIAL  [FIDUCIAL-MICRO]  199.77,30.23 0 top
FD30  FIDUCIALUFIDUCIAL  [FIDUCIAL-MICRO]  157.99,47.24 0 top
FD31  FIDUCIALUFIDUCIAL  [FIDUCIAL-MICRO]  157.86,44.83 0 bottom
FD32  FIDUCIALUFIDUCIAL  [FIDUCIAL-MICRO]  199.77,30.23 0 bottom
FD33  FIDUCIALUFIDUCIAL  [FIDUCIAL-MICRO]  54.23,51.05 0 top
FD34  FIDUCIALUFIDUCIAL  [FIDUCIAL-MICRO]  12.45,68.07 0 top
FD35  FIDUCIALUFIDUCIAL  [FIDUCIAL-MICRO]  12.32,65.66 0 bottom
FD36  FIDUCIALUFIDUCIAL  [FIDUCIAL-MICRO]  54.23,51.05 0 bottom
FD37  FIDUCIALUFIDUCIAL  [FIDUCIAL-MICRO]  102.74,51.05 0 top
FD38  FIDUCIALUFIDUCIAL  [FIDUCIAL-MICRO]  60.96,68.07 0 top
FD39  FIDUCIALUFIDUCIAL  [FIDUCIAL-MICRO]  60.83,65.66 0 bottom
FD40  FIDUCIALUFIDUCIAL  [FIDUCIAL-MICRO]  102.74,51.05 0 bottom
FD41  FIDUCIALUFIDUCIAL  [FIDUCIAL-MICRO]  151.26,51.05 0 top
FD42  FIDUCIALUFIDUCIAL  [FIDUCIAL-MICRO]  109.47,68.07 0 top
FD43  FIDUCIALUFIDUCIAL  [FIDUCIAL-MICRO]  109.35,65.66 0 bottom
FD44  FIDUCIALUFIDUCIAL  [FIDUCIAL-MICRO]  151.26,51.05 0 bottom
FD45  FIDUCIALUFIDUCIAL  [FIDUCIAL-MICRO]  199.77,51.05 0 top
FD46  FIDUCIALUFIDUCIAL  [FIDUCIAL-MICRO]  157.99,68.07 0 top
FD47  FIDUCIALUFIDUCIAL  [FIDUCIAL-MICRO]  157.86,65.66 0 bottom
FD48  FIDUCIALUFIDUCIAL  [FIDUCIAL-MICRO]  199.77,51.05 0 bottom
FD49  FIDUCIALUFIDUCIAL  [FIDUCIAL-MICRO]  54.23,71.88 0 top
FD50  FIDUCIALUFIDUCIAL  [FIDUCIAL-MICRO]  12.45,88.9 0 top
FD51  FIDUCIALUFIDUCIAL  [FIDUCIAL-MICRO]  12.32,86.49 0 bottom
FD52  FIDUCIALUFIDUCIAL  [FIDUCIAL-MICRO]  54.23,71.88 0 bottom
FD53  FIDUCIALUFIDUCIAL  [FIDUCIAL-MICRO]  102.74,71.88 0 top
FD54  FIDUCIALUFIDUCIAL  [FIDUCIAL-MICRO]  60.96,88.9 0 top
FD55  FIDUCIALUFIDUCIAL  [FIDUCIAL-MICRO]  60.83,86.49 0 bottom
FD56  FIDUCIALUFIDUCIAL  [FIDUCIAL-MICRO]  102.74,71.88 0 bottom
FD57  FIDUCIALUFIDUCIAL  [FIDUCIAL-MICRO]  151.26,71.88 0 top
FD58  FIDUCIALUFIDUCIAL  [FIDUCIAL-MICRO]  109.47,88.9 0 top
FD59  FIDUCIALUFIDUCIAL  [FIDUCIAL-MICRO]  109.35,86.49 0 bottom
FD60  FIDUCIALUFIDUCIAL  [FIDUCIAL-MICRO]  151.26,71.88 0 bottom
FD61  FIDUCIALUFIDUCIAL  [FIDUCIAL-MICRO]  199.77,71.88 0 top
FD62  FIDUCIALUFIDUCIAL  [FIDUCIAL-MICRO]  157.99,88.9 0 top
FD63  FIDUCIALUFIDUCIAL  [FIDUCIAL-MICRO]  157.86,86.49 0 bottom
FD64  FIDUCIALUFIDUCIAL  [FIDUCIAL-MICRO]  199.77,71.88 0 bottom
FRAME1  FRAME-LETTERNO_PACKAGE  [DUMMY]  60.2,6.86 0 bottom
FRAME2  FRAME-LETTERNO_PACKAGE  [DUMMY]  11.68,6.86 0 bottom
FRAME3  FRAME-LETTERNO_PACKAGE  [DUMMY]  108.71,6.86 0 bottom
FRAME4  FRAME-LETTERNO_PACKAGE  [DUMMY]  157.23,6.86 0 bottom
FRAME5  FRAME-LETTERNO_PACKAGE  [DUMMY]  11.68,27.69 0 bottom
FRAME6  FRAME-LETTERNO_PACKAGE  [DUMMY]  60.2,27.69 0 bottom
FRAME7  FRAME-LETTERNO_PACKAGE  [DUMMY]  108.71,27.69 0 bottom
FRAME8  FRAME-LETTERNO_PACKAGE  [DUMMY]  157.23,27.69 0 bottom
FRAME9  FRAME-LETTERNO_PACKAGE  [DUMMY]  11.68,48.51 0 bottom
FRAME10  FRAME-LETTERNO_PACKAGE  [DUMMY]  60.2,48.51 0 bottom
FRAME11  FRAME-LETTERNO_PACKAGE  [DUMMY]  108.71,48.51 0 bottom
FRAME12  FRAME-LETTERNO_PACKAGE  [DUMMY]  157.23,48.51 0 bottom
FRAME13  FRAME-LETTERNO_PACKAGE  [DUMMY]  11.68,69.34 0 bottom
FRAME14  FRAME-LETTERNO_PACKAGE  [DUMMY]  60.2,69.34 0 bottom
FRAME15  FRAME-LETTERNO_PACKAGE  [DUMMY]  108.71,69.34 0 bottom
FRAME16  FRAME-LETTERNO_PACKAGE  [DUMMY]  157.23,69.34 0 bottom
J1  [JST-2-SMD]  15.14,11.33 90 top
J2  [1X12_NO_SILK]  53.59,23.37 180 top
J3  [JST04_1MM_RA]  33.27,11.81 0 top
J4  [1X02_NO_SILK]  23.11,15.75 90 top
J5  [1X02_NO_SILK]  28.19,10.67 180 top
J6  [JST04_1MM_RA]  81.79,11.81 0 top
J7  [1X07_NO_SILK]  53.59,10.67 180 top
J8  [1X12_NO_SILK]  102.11,23.37 180 top
J9  [1X07_NO_SILK]  38.35,8.13 0 top
J10  USB Female Type C Connector  [USB-C-16P-4LAYER-ISOLATED]  18.03,20.83 270 top
J11  CORTEX_DEBUG  [2X5-PTH-1.27MM-NO_SILK]  39.75,17.02 270 top
J12  [1X02_NO_SILK]  12.95,10.03 90 top
J13  [1X12_NO_SILK]  25.65,25.91 0 top
J14  [1X02_NO_SILK]  25.65,8.13 0 top
J15  [1X02_NO_SILK]  76.71,10.67 180 top
J16  [1X07_NO_SILK]  102.11,10.67 180 top
J17  [JST-2-SMD]  63.65,11.33 90 top
J18  [1X07_NO_SILK]  86.87,8.13 0 top
J19  [1X02_NO_SILK]  61.47,10.03 90 top
J20  [1X12_NO_SILK]  74.17,25.91 0 top
J21  [1X02_NO_SILK]  74.17,8.13 0 top
J22  USB Female Type C Connector  [USB-C-16P-4LAYER-ISOLATED]  66.55,20.83 270 top
J23  CORTEX_DEBUG  [2X5-PTH-1.27MM-NO_SILK]  88.27,17.02 270 top
J24  [1X02_NO_SILK]  71.63,15.75 90 top
J25  [JST04_1MM_RA]  130.3,11.81 0 top
J26  [1X12_NO_SILK]  150.62,23.37 180 top
J27  [1X02_NO_SILK]  125.22,10.67 180 top
J28  [1X07_NO_SILK]  150.62,10.67 180 top
J29  [JST-2-SMD]  112.17,11.33 90 top
J30  [1X07_NO_SILK]  135.38,8.13 0 top
J31  [1X02_NO_SILK]  109.98,10.03 90 top
J32  [1X12_NO_SILK]  122.68,25.91 0 top
J33  [1X02_NO_SILK]  122.68,8.13 0 top
J34  USB Female Type C Connector  [USB-C-16P-4LAYER-ISOLATED]  115.06,20.83 270 top
J35  CORTEX_DEBUG  [2X5-PTH-1.27MM-NO_SILK]  136.78,17.02 270 top
J36  [1X02_NO_SILK]  120.14,15.75 90 top
J37  [JST04_1MM_RA]  178.82,11.81 0 top
J38  [1X12_NO_SILK]  199.14,23.37 180 top
J39  [1X02_NO_SILK]  173.74,10.67 180 top
J40  [1X07_NO_SILK]  199.14,10.67 180 top
J41  [JST-2-SMD]  160.68,11.33 90 top
J42  [1X07_NO_SILK]  183.9,8.13 0 top
J43  [1X02_NO_SILK]  158.5,10.03 90 top
J44  [1X12_NO_SILK]  171.2,25.91 0 top
J45  [1X02_NO_SILK]  171.2,8.13 0 top
J46  USB Female Type C Connector  [USB-C-16P-4LAYER-ISOLATED]  163.58,20.83 270 top
J47  CORTEX_DEBUG  [2X5-PTH-1.27MM-NO_SILK]  185.29,17.02 270 top
J48  [1X02_NO_SILK]  168.66,15.75 90 top
J49  [JST04_1MM_RA]  33.27,32.64 0 top
J50  [1X12_NO_SILK]  53.59,44.2 180 top
J51  [1X02_NO_SILK]  28.19,31.5 180 top
J52  [1X07_NO_SILK]  53.59,31.5 180 top
J53  [JST-2-SMD]  15.14,32.16 90 top
J54  [1X07_NO_SILK]  38.35,28.96 0 top
J55  [1X02_NO_SILK]  12.95,30.86 90 top
J56  [1X12_NO_SILK]  25.65,46.74 0 top
J57  [1X02_NO_SILK]  25.65,28.96 0 top
J58  USB Female Type C Connector  [USB-C-16P-4LAYER-ISOLATED]  18.03,41.66 270 top
J59  CORTEX_DEBUG  [2X5-PTH-1.27MM-NO_SILK]  39.75,37.85 270 top
J60  [1X02_NO_SILK]  23.11,36.58 90 top
J61  [JST04_1MM_RA]  81.79,32.64 0 top
J62  [1X12_NO_SILK]  102.11,44.2 180 top
J63  [1X02_NO_SILK]  76.71,31.5 180 top
J64  [1X07_NO_SILK]  102.11,31.5 180 top
J65  [JST-2-SMD]  63.65,32.16 90 top
J66  [1X07_NO_SILK]  86.87,28.96 0 top
J67  [1X02_NO_SILK]  61.47,30.86 90 top
J68  [1X12_NO_SILK]  74.17,46.74 0 top
J69  [1X02_NO_SILK]  74.17,28.96 0 top
J70  USB Female Type C Connector  [USB-C-16P-4LAYER-ISOLATED]  66.55,41.66 270 top
J71  CORTEX_DEBUG  [2X5-PTH-1.27MM-NO_SILK]  88.27,37.85 270 top
J72  [1X02_NO_SILK]  71.63,36.58 90 top
J73  [JST04_1MM_RA]  130.3,32.64 0 top
J74  [1X12_NO_SILK]  150.62,44.2 180 top
J75  [1X02_NO_SILK]  125.22,31.5 180 top
J76  [1X07_NO_SILK]  150.62,31.5 180 top
J77  [JST-2-SMD]  112.17,32.16 90 top
J78  [1X07_NO_SILK]  135.38,28.96 0 top
J79  [1X02_NO_SILK]  109.98,30.86 90 top
J80  [1X12_NO_SILK]  122.68,46.74 0 top
J81  [1X02_NO_SILK]  122.68,28.96 0 top
J82  USB Female Type C Connector  [USB-C-16P-4LAYER-ISOLATED]  115.06,41.66 270 top
J83  CORTEX_DEBUG  [2X5-PTH-1.27MM-NO_SILK]  136.78,37.85 270 top
J84  [1X02_NO_SILK]  120.14,36.58 90 top
J85  [JST04_1MM_RA]  178.82,32.64 0 top
J86  [1X12_NO_SILK]  199.14,44.2 180 top
J87  [1X02_NO_SILK]  173.74,31.5 180 top
J88  [1X07_NO_SILK]  199.14,31.5 180 top
J89  [JST-2-SMD]  160.68,32.16 90 top
J90  [1X07_NO_SILK]  183.9,28.96 0 top
J91  [1X02_NO_SILK]  158.5,30.86 90 top
J92  [1X12_NO_SILK]  171.2,46.74 0 top
J93  [1X02_NO_SILK]  171.2,28.96 0 top
J94  USB Female Type C Connector  [USB-C-16P-4LAYER-ISOLATED]  163.58,41.66 270 top
J95  CORTEX_DEBUG  [2X5-PTH-1.27MM-NO_SILK]  185.29,37.85 270 top
J96  [1X02_NO_SILK]  168.66,36.58 90 top
J97  [JST04_1MM_RA]  33.27,53.47 0 top
J98  [1X12_NO_SILK]  53.59,65.02 180 top
J99  [1X02_NO_SILK]  28.19,52.32 180 top
J100  [1X07_NO_SILK]  53.59,52.32 180 top
J101  [JST-2-SMD]  15.14,52.98 90 top
J102  [1X07_NO_SILK]  38.35,49.78 0 top
J103  [1X02_NO_SILK]  12.95,51.69 90 top
J104  [1X12_NO_SILK]  25.65,67.56 0 top
J105  [1X02_NO_SILK]  25.65,49.78 0 top
J106  USB Female Type C Connector  [USB-C-16P-4LAYER-ISOLATED]  18.03,62.48 270 top
J107  CORTEX_DEBUG  [2X5-PTH-1.27MM-NO_SILK]  39.75,58.67 270 top
J108  [1X02_NO_SILK]  23.11,57.4 90 top
J109  [JST04_1MM_RA]  81.79,53.47 0 top
J110  [1X12_NO_SILK]  102.11,65.02 180 top
J111  [1X02_NO_SILK]  76.71,52.32 180 top
J112  [1X07_NO_SILK]  102.11,52.32 180 top
J113  [JST-2-SMD]  63.65,52.98 90 top
J114  [1X07_NO_SILK]  86.87,49.78 0 top
J115  [1X02_NO_SILK]  61.47,51.69 90 top
J116  [1X12_NO_SILK]  74.17,67.56 0 top
J117  [1X02_NO_SILK]  74.17,49.78 0 top
J118  USB Female Type C Connector  [USB-C-16P-4LAYER-ISOLATED]  66.55,62.48 270 top
J119  CORTEX_DEBUG  [2X5-PTH-1.27MM-NO_SILK]  88.27,58.67 270 top
J120  [1X02_NO_SILK]  71.63,57.4 90 top
J121  [JST04_1MM_RA]  130.3,53.47 0 top
J122  [1X12_NO_SILK]  150.62,65.02 180 top
J123  [1X02_NO_SILK]  125.22,52.32 180 top
J124  [1X07_NO_SILK]  150.62,52.32 180 top
J125  [JST-2-SMD]  112.17,52.98 90 top
J126  [1X07_NO_SILK]  135.38,49.78 0 top
J127  [1X02_NO_SILK]  109.98,51.69 90 top
J128  [1X12_NO_SILK]  122.68,67.56 0 top
J129  [1X02_NO_SILK]  122.68,49.78 0 top
J130  USB Female Type C Connector  [USB-C-16P-4LAYER-ISOLATED]  115.06,62.48 270 top
J131  CORTEX_DEBUG  [2X5-PTH-1.27MM-NO_SILK]  136.78,58.67 270 top
J132  [1X02_NO_SILK]  120.14,57.4 90 top
J133  [JST04_1MM_RA]  178.82,53.47 0 top
J134  [1X12_NO_SILK]  199.14,65.02 180 top
J135  [1X02_NO_SILK]  173.74,52.32 180 top
J136  [1X07_NO_SILK]  199.14,52.32 180 top
J137  [JST-2-SMD]  160.68,52.98 90 top
J138  [1X07_NO_SILK]  183.9,49.78 0 top
J139  [1X02_NO_SILK]  158.5,51.69 90 top
J140  [1X12_NO_SILK]  171.2,67.56 0 top
J141  [1X02_NO_SILK]  171.2,49.78 0 top
J142  USB Female Type C Connector  [USB-C-16P-4LAYER-ISOLATED]  163.58,62.48 270 top
J143  CORTEX_DEBUG  [2X5-PTH-1.27MM-NO_SILK]  185.29,58.67 270 top
J144  [1X02_NO_SILK]  168.66,57.4 90 top
J145  [JST04_1MM_RA]  33.27,74.3 0 top
J146  [1X12_NO_SILK]  53.59,85.85 180 top
J147  [1X02_NO_SILK]  28.19,73.15 180 top
J148  [1X07_NO_SILK]  53.59,73.15 180 top
J149  [JST-2-SMD]  15.14,73.81 90 top
J150  [1X07_NO_SILK]  38.35,70.61 0 top
J151  [1X02_NO_SILK]  12.95,72.52 90 top
J152  [1X12_NO_SILK]  25.65,88.39 0 top
J153  [1X02_NO_SILK]  25.65,70.61 0 top
J154  USB Female Type C Connector  [USB-C-16P-4LAYER-ISOLATED]  18.03,83.31 270 top
J155  CORTEX_DEBUG  [2X5-PTH-1.27MM-NO_SILK]  39.75,79.5 270 top
J156  [1X02_NO_SILK]  23.11,78.23 90 top
J157  [JST04_1MM_RA]  81.79,74.3 0 top
J158  [1X12_NO_SILK]  102.11,85.85 180 top
J159  [1X02_NO_SILK]  76.71,73.15 180 top
J160  [1X07_NO_SILK]  102.11,73.15 180 top
J161  [JST-2-SMD]  63.65,73.81 90 top
J162  [1X07_NO_SILK]  86.87,70.61 0 top
J163  [1X02_NO_SILK]  61.47,72.52 90 top
J164  [1X12_NO_SILK]  74.17,88.39 0 top
J165  [1X02_NO_SILK]  74.17,70.61 0 top
J166  USB Female Type C Connector  [USB-C-16P-4LAYER-ISOLATED]  66.55,83.31 270 top
J167  CORTEX_DEBUG  [2X5-PTH-1.27MM-NO_SILK]  88.27,79.5 270 top
J168  [1X02_NO_SILK]  71.63,78.23 90 top
J169  [JST04_1MM_RA]  130.3,74.3 0 top
J170  [1X12_NO_SILK]  150.62,85.85 180 top
J171  [1X02_NO_SILK]  125.22,73.15 180 top
J172  [1X07_NO_SILK]  150.62,73.15 180 top
J173  [JST-2-SMD]  112.17,73.81 90 top
J174  [1X07_NO_SILK]  135.38,70.61 0 top
J175  [1X02_NO_SILK]  109.98,72.52 90 top
J176  [1X12_NO_SILK]  122.68,88.39 0 top
J177  [1X02_NO_SILK]  122.68,70.61 0 top
J178  USB Female Type C Connector  [USB-C-16P-4LAYER-ISOLATED]  115.06,83.31 270 top
J179  CORTEX_DEBUG  [2X5-PTH-1.27MM-NO_SILK]  136.78,79.5 270 top
J180  [1X02_NO_SILK]  120.14,78.23 90 top
J181  [JST04_1MM_RA]  178.82,74.3 0 top
J182  [1X12_NO_SILK]  199.14,85.85 180 top
J183  [1X02_NO_SILK]  173.74,73.15 180 top
J184  [1X07_NO_SILK]  199.14,73.15 180 top
J185  [JST-2-SMD]  160.68,73.81 90 top
J186  [1X07_NO_SILK]  183.9,70.61 0 top
J187  [1X02_NO_SILK]  158.5,72.52 90 top
J188  [1X12_NO_SILK]  171.2,88.39 0 top
J189  [1X02_NO_SILK]  171.2,70.61 0 top
J190  USB Female Type C Connector  [USB-C-16P-4LAYER-ISOLATED]  163.58,83.31 270 top
J191  CORTEX_DEBUG  [2X5-PTH-1.27MM-NO_SILK]  185.29,79.5 270 top
J192  [1X02_NO_SILK]  168.66,78.23 90 top
LOGO1  SFE_LOGO_FLAME.1_INCH  [SFE_LOGO_FLAME_.1]  25.78,17.14 0 top
LOGO2  SFE_LOGO_FLAME.1_INCH  [SFE_LOGO_FLAME_.1]  74.3,17.14 0 top
LOGO3  SFE_LOGO_FLAME.1_INCH  [SFE_LOGO_FLAME_.1]  66.55,12.06 0 bottom
LOGO4  SFE_LOGO_FLAME.1_INCH  [SFE_LOGO_FLAME_.1]  18.03,12.06 0 bottom
LOGO5  SFE_LOGO_FLAME.1_INCH  [SFE_LOGO_FLAME_.1]  122.81,17.14 0 top
LOGO6  SFE_LOGO_FLAME.1_INCH  [SFE_LOGO_FLAME_.1]  115.06,12.06 0 bottom
LOGO7  SFE_LOGO_FLAME.1_INCH  [SFE_LOGO_FLAME_.1]  171.32,17.14 0 top
LOGO8  SFE_LOGO_FLAME.1_INCH  [SFE_LOGO_FLAME_.1]  163.58,12.06 0 bottom
LOGO9  SFE_LOGO_FLAME.1_INCH  [SFE_LOGO_FLAME_.1]  25.78,37.97 0 top
LOGO10  SFE_LOGO_FLAME.1_INCH  [SFE_LOGO_FLAME_.1]  18.03,32.89 0 bottom
LOGO11  SFE_LOGO_FLAME.1_INCH  [SFE_LOGO_FLAME_.1]  74.3,37.97 0 top
LOGO12  SFE_LOGO_FLAME.1_INCH  [SFE_LOGO_FLAME_.1]  66.55,32.89 0 bottom
LOGO13  SFE_LOGO_FLAME.1_INCH  [SFE_LOGO_FLAME_.1]  122.81,37.97 0 top
LOGO14  SFE_LOGO_FLAME.1_INCH  [SFE_LOGO_FLAME_.1]  115.06,32.89 0 bottom
LOGO15  SFE_LOGO_FLAME.1_INCH  [SFE_LOGO_FLAME_.1]  171.32,37.97 0 top
LOGO16  SFE_LOGO_FLAME.1_INCH  [SFE_LOGO_FLAME_.1]  163.58,32.89 0 bottom
LOGO17  SFE_LOGO_FLAME.1_INCH  [SFE_LOGO_FLAME_.1]  25.78,58.8 0 top
LOGO18  SFE_LOGO_FLAME.1_INCH  [SFE_LOGO_FLAME_.1]  18.03,53.72 0 bottom
LOGO19  SFE_LOGO_FLAME.1_INCH  [SFE_LOGO_FLAME_.1]  74.3,58.8 0 top
LOGO20  SFE_LOGO_FLAME.1_INCH  [SFE_LOGO_FLAME_.1]  66.55,53.72 0 bottom
LOGO21  SFE_LOGO_FLAME.1_INCH  [SFE_LOGO_FLAME_.1]  122.81,58.8 0 top
LOGO22  SFE_LOGO_FLAME.1_INCH  [SFE_LOGO_FLAME_.1]  115.06,53.72 0 bottom
LOGO23  SFE_LOGO_FLAME.1_INCH  [SFE_LOGO_FLAME_.1]  171.32,58.8 0 top
LOGO24  SFE_LOGO_FLAME.1_INCH  [SFE_LOGO_FLAME_.1]  163.58,53.72 0 bottom
LOGO25  SFE_LOGO_FLAME.1_INCH  [SFE_LOGO_FLAME_.1]  25.78,79.63 0 top
LOGO26  SFE_LOGO_FLAME.1_INCH  [SFE_LOGO_FLAME_.1]  18.03,74.55 0 bottom
LOGO27  SFE_LOGO_FLAME.1_INCH  [SFE_LOGO_FLAME_.1]  74.3,79.63 0 top
LOGO28  SFE_LOGO_FLAME.1_INCH  [SFE_LOGO_FLAME_.1]  66.55,74.55 0 bottom
LOGO29  SFE_LOGO_FLAME.1_INCH  [SFE_LOGO_FLAME_.1]  122.81,79.63 0 top
LOGO30  SFE_LOGO_FLAME.1_INCH  [SFE_LOGO_FLAME_.1]  115.06,74.55 0 bottom
LOGO31  SFE_LOGO_FLAME.1_INCH  [SFE_LOGO_FLAME_.1]  171.32,79.63 0 top
LOGO32  SFE_LOGO_FLAME.1_INCH  [SFE_LOGO_FLAME_.1]  163.58,74.55 0 bottom
R1  10k  [0603]  20.57,15.75 0 bottom
R2  1k  [0603]  76.71,20.95 180 bottom
R3  1k  [0603]  34.16,12.95 180 bottom
R4  1k  [0603]  82.68,12.95 180 bottom
R5  2.0k  [0603]  28.19,19.68 180 bottom
R6  1k  [0603]  32,19.68 0 bottom
R7  2.0k  [0603]  76.71,19.68 180 bottom
R8  1k  [0603]  80.52,19.68 0 bottom
R9  1k  [0603]  82.68,14.35 180 bottom
R10  1k  [0603]  28.19,20.95 180 bottom
R11  5.1k  [0603]  14.99,15.24 180 bottom
R12  1k  [0603]  34.16,14.35 180 bottom
R13  5.1k  [0603]  14.99,26.42 180 bottom
R14  100k  [0603]  20.57,22.1 0 bottom
R15  220k  [0603]  20.57,18.29 180 bottom
R16  1k  [0603]  32,20.95 0 bottom
R17  DNP  [0603]  20.57,17.02 180 bottom
R18  1k  [0603]  80.52,20.95 0 bottom
R19  5.1k  [0603]  63.5,15.24 180 bottom
R20  5.1k  [0603]  63.5,26.42 180 bottom
R21  100k  [0603]  69.09,22.1 0 bottom
R22  220k  [0603]  69.09,18.29 180 bottom
R23  DNP  [0603]  69.09,17.02 180 bottom
R24  10k  [0603]  69.09,15.75 0 bottom
R25  1k  [0603]  125.22,20.95 180 bottom
R26  1k  [0603]  131.19,12.95 180 bottom
R27  2.0k  [0603]  125.22,19.68 180 bottom
R28  1k  [0603]  129.03,19.68 0 bottom
R29  1k  [0603]  131.19,14.35 180 bottom
R30  1k  [0603]  129.03,20.95 0 bottom
R31  5.1k  [0603]  112.01,15.24 180 bottom
R32  5.1k  [0603]  112.01,26.42 180 bottom
R33  100k  [0603]  117.6,22.1 0 bottom
R34  220k  [0603]  117.6,18.29 180 bottom
R35  DNP  [0603]  117.6,17.02 180 bottom
R36  10k  [0603]  117.6,15.75 0 bottom
R37  1k  [0603]  173.74,20.95 180 bottom
R38  1k  [0603]  179.7,12.95 180 bottom
R39  2.0k  [0603]  173.74,19.68 180 bottom
R40  1k  [0603]  177.55,19.68 0 bottom
R41  1k  [0603]  179.7,14.35 180 bottom
R42  1k  [0603]  177.55,20.95 0 bottom
R43  5.1k  [0603]  160.53,15.24 180 bottom
R44  5.1k  [0603]  160.53,26.42 180 bottom
R45  100k  [0603]  166.12,22.1 0 bottom
R46  220k  [0603]  166.12,18.29 180 bottom
R47  DNP  [0603]  166.12,17.02 180 bottom
R48  10k  [0603]  166.12,15.75 0 bottom
R49  1k  [0603]  28.19,41.78 180 bottom
R50  1k  [0603]  34.16,33.78 180 bottom
R51  2.0k  [0603]  28.19,40.51 180 bottom
R52  1k  [0603]  32,40.51 0 bottom
R53  1k  [0603]  34.16,35.18 180 bottom
R54  1k  [0603]  32,41.78 0 bottom
R55  5.1k  [0603]  14.99,36.07 180 bottom
R56  5.1k  [0603]  14.99,47.24 180 bottom
R57  100k  [0603]  20.57,42.93 0 bottom
R58  220k  [0603]  20.57,39.12 180 bottom
R59  DNP  [0603]  20.57,37.85 180 bottom
R60  10k  [0603]  20.57,36.58 0 bottom
R61  1k  [0603]  76.71,41.78 180 bottom
R62  1k  [0603]  82.68,33.78 180 bottom
R63  2.0k  [0603]  76.71,40.51 180 bottom
R64  1k  [0603]  80.52,40.51 0 bottom
R65  1k  [0603]  82.68,35.18 180 bottom
R66  1k  [0603]  80.52,41.78 0 bottom
R67  5.1k  [0603]  63.5,36.07 180 bottom
R68  5.1k  [0603]  63.5,47.24 180 bottom
R69  100k  [0603]  69.09,42.93 0 bottom
R70  220k  [0603]  69.09,39.12 180 bottom
R71  DNP  [0603]  69.09,37.85 180 bottom
R72  10k  [0603]  69.09,36.58 0 bottom
R73  1k  [0603]  125.22,41.78 180 bottom
R74  1k  [0603]  131.19,33.78 180 bottom
R75  2.0k  [0603]  125.22,40.51 180 bottom
R76  1k  [0603]  129.03,40.51 0 bottom
R77  1k  [0603]  131.19,35.18 180 bottom
R78  1k  [0603]  129.03,41.78 0 bottom
R79  5.1k  [0603]  112.01,36.07 180 bottom
R80  5.1k  [0603]  112.01,47.24 180 bottom
R81  100k  [0603]  117.6,42.93 0 bottom
R82  220k  [0603]  117.6,39.12 180 bottom
R83  DNP  [0603]  117.6,37.85 180 bottom
R84  10k  [0603]  117.6,36.58 0 bottom
R85  1k  [0603]  173.74,41.78 180 bottom
R86  1k  [0603]  179.7,33.78 180 bottom
R87  2.0k  [0603]  173.74,40.51 180 bottom
R88  1k  [0603]  177.55,40.51 0 bottom
R89  1k  [0603]  179.7,35.18 180 bottom
R90  1k  [0603]  177.55,41.78 0 bottom
R91  5.1k  [0603]  160.53,36.07 180 bottom
R92  5.1k  [0603]  160.53,47.24 180 bottom
R93  100k  [0603]  166.12,42.93 0 bottom
R94  220k  [0603]  166.12,39.12 180 bottom
R95  DNP  [0603]  166.12,37.85 180 bottom
R96  10k  [0603]  166.12,36.58 0 bottom
R97  1k  [0603]  28.19,62.61 180 bottom
R98  1k  [0603]  34.16,54.61 180 bottom
R99  2.0k  [0603]  28.19,61.34 180 bottom
R100  1k  [0603]  32,61.34 0 bottom
R101  1k  [0603]  34.16,56.01 180 bottom
R102  1k  [0603]  32,62.61 0 bottom
R103  5.1k  [0603]  14.99,56.9 180 bottom
R104  5.1k  [0603]  14.99,68.07 180 bottom
R105  100k  [0603]  20.57,63.75 0 bottom
R106  220k  [0603]  20.57,59.94 180 bottom
R107  DNP  [0603]  20.57,58.67 180 bottom
R108  10k  [0603]  20.57,57.4 0 bottom
R109  1k  [0603]  76.71,62.61 180 bottom
R110  1k  [0603]  82.68,54.61 180 bottom
R111  2.0k  [0603]  76.71,61.34 180 bottom
R112  1k  [0603]  80.52,61.34 0 bottom
R113  1k  [0603]  82.68,56.01 180 bottom
R114  1k  [0603]  80.52,62.61 0 bottom
R115  5.1k  [0603]  63.5,56.9 180 bottom
R116  5.1k  [0603]  63.5,68.07 180 bottom
R117  100k  [0603]  69.09,63.75 0 bottom
R118  220k  [0603]  69.09,59.94 180 bottom
R119  DNP  [0603]  69.09,58.67 180 bottom
R120  10k  [0603]  69.09,57.4 0 bottom
R121  1k  [0603]  125.22,62.61 180 bottom
R122  1k  [0603]  131.19,54.61 180 bottom
R123  2.0k  [0603]  125.22,61.34 180 bottom
R124  1k  [0603]  129.03,61.34 0 bottom
R125  1k  [0603]  131.19,56.01 180 bottom
R126  1k  [0603]  129.03,62.61 0 bottom
R127  5.1k  [0603]  112.01,56.9 180 bottom
R128  5.1k  [0603]  112.01,68.07 180 bottom
R129  100k  [0603]  117.6,63.75 0 bottom
R130  220k  [0603]  117.6,59.94 180 bottom
R131  DNP  [0603]  117.6,58.67 180 bottom
R132  10k  [0603]  117.6,57.4 0 bottom
R133  1k  [0603]  173.74,62.61 180 bottom
R134  1k  [0603]  179.7,54.61 180 bottom
R135  2.0k  [0603]  173.74,61.34 180 bottom
R136  1k  [0603]  177.55,61.34 0 bottom
R137  1k  [0603]  179.7,56.01 180 bottom
R138  1k  [0603]  177.55,62.61 0 bottom
R139  5.1k  [0603]  160.53,56.9 180 bottom
R140  5.1k  [0603]  160.53,68.07 180 bottom
R141  100k  [0603]  166.12,63.75 0 bottom
R142  220k  [0603]  166.12,59.94 180 bottom
R143  DNP  [0603]  166.12,58.67 180 bottom
R144  10k  [0603]  166.12,57.4 0 bottom
R145  1k  [0603]  28.19,83.44 180 bottom
R146  1k  [0603]  34.16,75.44 180 bottom
R147  2.0k  [0603]  28.19,82.17 180 bottom
R148  1k  [0603]  32,82.17 0 bottom
R149  1k  [0603]  34.16,76.84 180 bottom
R150  1k  [0603]  32,83.44 0 bottom
R151  5.1k  [0603]  14.99,77.72 180 bottom
R152  5.1k  [0603]  14.99,88.9 180 bottom
R153  100k  [0603]  20.57,84.58 0 bottom
R154  220k  [0603]  20.57,80.77 180 bottom
R155  DNP  [0603]  20.57,79.5 180 bottom
R156  10k  [0603]  20.57,78.23 0 bottom
R157  1k  [0603]  76.71,83.44 180 bottom
R158  1k  [0603]  82.68,75.44 180 bottom
R159  2.0k  [0603]  76.71,82.17 180 bottom
R160  1k  [0603]  80.52,82.17 0 bottom
R161  1k  [0603]  82.68,76.84 180 bottom
R162  1k  [0603]  80.52,83.44 0 bottom
R163  5.1k  [0603]  63.5,77.72 180 bottom
R164  5.1k  [0603]  63.5,88.9 180 bottom
R165  100k  [0603]  69.09,84.58 0 bottom
R166  220k  [0603]  69.09,80.77 180 bottom
R167  DNP  [0603]  69.09,79.5 180 bottom
R168  10k  [0603]  69.09,78.23 0 bottom
R169  1k  [0603]  125.22,83.44 180 bottom
R170  1k  [0603]  131.19,75.44 180 bottom
R171  2.0k  [0603]  125.22,82.17 180 bottom
R172  1k  [0603]  129.03,82.17 0 bottom
R173  1k  [0603]  131.19,76.84 180 bottom
R174  1k  [0603]  129.03,83.44 0 bottom
R175  5.1k  [0603]  112.01,77.72 180 bottom
R176  5.1k  [0603]  112.01,88.9 180 bottom
R177  100k  [0603]  117.6,84.58 0 bottom
R178  220k  [0603]  117.6,80.77 180 bottom
R179  DNP  [0603]  117.6,79.5 180 bottom
R180  10k  [0603]  117.6,78.23 0 bottom
R181  1k  [0603]  173.74,83.44 180 bottom
R182  1k  [0603]  179.7,75.44 180 bottom
R183  2.0k  [0603]  173.74,82.17 180 bottom
R184  1k  [0603]  177.55,82.17 0 bottom
R185  1k  [0603]  179.7,76.84 180 bottom
R186  1k  [0603]  177.55,83.44 0 bottom
R187  5.1k  [0603]  160.53,77.72 180 bottom
R188  5.1k  [0603]  160.53,88.9 180 bottom
R189  100k  [0603]  166.12,84.58 0 bottom
R190  220k  [0603]  166.12,80.77 180 bottom
R191  DNP  [0603]  166.12,79.5 180 bottom
R192  10k  [0603]  166.12,78.23 0 bottom
S1  RESET  [TACTILE_SWITCH_SMD_4.6X2.8MM]  21.84,25.65 180 top
S2  RESET  [TACTILE_SWITCH_SMD_4.6X2.8MM]  70.36,25.65 180 top
S3  RESET  [TACTILE_SWITCH_SMD_4.6X2.8MM]  118.87,25.65 180 top
S4  RESET  [TACTILE_SWITCH_SMD_4.6X2.8MM]  167.39,25.65 180 top
S5  RESET  [TACTILE_SWITCH_SMD_4.6X2.8MM]  21.84,46.48 180 top
S6  RESET  [TACTILE_SWITCH_SMD_4.6X2.8MM]  70.36,46.48 180 top
S7  RESET  [TACTILE_SWITCH_SMD_4.6X2.8MM]  118.87,46.48 180 top
S8  RESET  [TACTILE_SWITCH_SMD_4.6X2.8MM]  167.39,46.48 180 top
S9  RESET  [TACTILE_SWITCH_SMD_4.6X2.8MM]  21.84,67.31 180 top
S10  RESET  [TACTILE_SWITCH_SMD_4.6X2.8MM]  70.36,67.31 180 top
S11  RESET  [TACTILE_SWITCH_SMD_4.6X2.8MM]  118.87,67.31 180 top
S12  RESET  [TACTILE_SWITCH_SMD_4.6X2.8MM]  167.39,67.31 180 top
S13  RESET  [TACTILE_SWITCH_SMD_4.6X2.8MM]  21.84,88.14 180 top
S14  RESET  [TACTILE_SWITCH_SMD_4.6X2.8MM]  70.36,88.14 180 top
S15  RESET  [TACTILE_SWITCH_SMD_4.6X2.8MM]  118.87,88.14 180 top
S16  RESET  [TACTILE_SWITCH_SMD_4.6X2.8MM]  167.39,88.14 180 top
TP1  [PAD.03X.05]  41.66,15.11 0 bottom
TP2  [PAD.03X.05]  42.42,17.27 0 bottom
TP3  TEST-POINT3X5  [PAD.03X.05]  35.31,20.07 0 bottom
TP4  TEST-POINT3X5  [PAD.03X.05]  41.78,19.56 0 bottom
TP5  TEST-POINT3X5  [PAD.03X.05]  15.24,16.76 0 bottom
TP6  TEST-POINT3X5  [PAD.03X.05]  12.95,18.16 0 bottom
TP7  TEST-POINT3X5  [PAD.03X.05]  63.75,16.76 0 bottom
TP8  TEST-POINT3X5  [PAD.03X.05]  61.47,18.16 0 bottom
TP9  [PAD.03X.05]  90.17,15.11 0 bottom
TP10  [PAD.03X.05]  90.93,17.27 0 bottom
TP11  TEST-POINT3X5  [PAD.03X.05]  83.82,20.07 0 bottom
TP12  TEST-POINT3X5  [PAD.03X.05]  90.3,19.56 0 bottom
TP13  TEST-POINT3X5  [PAD.03X.05]  112.27,16.76 0 bottom
TP14  TEST-POINT3X5  [PAD.03X.05]  109.98,18.16 0 bottom
TP15  [PAD.03X.05]  138.68,15.11 0 bottom
TP16  [PAD.03X.05]  139.45,17.27 0 bottom
TP17  TEST-POINT3X5  [PAD.03X.05]  132.33,20.07 0 bottom
TP18  TEST-POINT3X5  [PAD.03X.05]  138.81,19.56 0 bottom
TP19  TEST-POINT3X5  [PAD.03X.05]  160.78,16.76 0 bottom
TP20  TEST-POINT3X5  [PAD.03X.05]  158.5,18.16 0 bottom
TP21  [PAD.03X.05]  187.2,15.11 0 bottom
TP22  [PAD.03X.05]  187.96,17.27 0 bottom
TP23  TEST-POINT3X5  [PAD.03X.05]  180.85,20.07 0 bottom
TP24  TEST-POINT3X5  [PAD.03X.05]  187.32,19.56 0 bottom
TP25  TEST-POINT3X5  [PAD.03X.05]  15.24,37.59 0 bottom
TP26  TEST-POINT3X5  [PAD.03X.05]  12.95,38.99 0 bottom
TP27  [PAD.03X.05]  41.66,35.94 0 bottom
TP28  [PAD.03X.05]  42.42,38.1 0 bottom
TP29  TEST-POINT3X5  [PAD.03X.05]  35.31,40.89 0 bottom
TP30  TEST-POINT3X5  [PAD.03X.05]  41.78,40.39 0 bottom
TP31  TEST-POINT3X5  [PAD.03X.05]  63.75,37.59 0 bottom
TP32  TEST-POINT3X5  [PAD.03X.05]  61.47,38.99 0 bottom
TP33  [PAD.03X.05]  90.17,35.94 0 bottom
TP34  [PAD.03X.05]  90.93,38.1 0 bottom
TP35  TEST-POINT3X5  [PAD.03X.05]  83.82,40.89 0 bottom
TP36  TEST-POINT3X5  [PAD.03X.05]  90.3,40.39 0 bottom
TP37  TEST-POINT3X5  [PAD.03X.05]  112.27,37.59 0 bottom
TP38  TEST-POINT3X5  [PAD.03X.05]  109.98,38.99 0 bottom
TP39  [PAD.03X.05]  138.68,35.94 0 bottom
TP40  [PAD.03X.05]  139.45,38.1 0 bottom
TP41  TEST-POINT3X5  [PAD.03X.05]  132.33,40.89 0 bottom
TP42  TEST-POINT3X5  [PAD.03X.05]  138.81,40.39 0 bottom
TP43  TEST-POINT3X5  [PAD.03X.05]  160.78,37.59 0 bottom
TP44  TEST-POINT3X5  [PAD.03X.05]  158.5,38.99 0 bottom
TP45  [PAD.03X.05]  187.2,35.94 0 bottom
TP46  [PAD.03X.05]  187.96,38.1 0 bottom
TP47  TEST-POINT3X5  [PAD.03X.05]  180.85,40.89 0 bottom
TP48  TEST-POINT3X5  [PAD.03X.05]  187.32,40.39 0 bottom
TP49  TEST-POINT3X5  [PAD.03X.05]  15.24,58.42 0 bottom
TP50  TEST-POINT3X5  [PAD.03X.05]  12.95,59.82 0 bottom
TP51  [PAD.03X.05]  41.66,56.77 0 bottom
TP52  [PAD.03X.05]  42.42,58.93 0 bottom
TP53  TEST-POINT3X5  [PAD.03X.05]  35.31,61.72 0 bottom
TP54  TEST-POINT3X5  [PAD.03X.05]  41.78,61.21 0 bottom
TP55  TEST-POINT3X5  [PAD.03X.05]  63.75,58.42 0 bottom
TP56  TEST-POINT3X5  [PAD.03X.05]  61.47,59.82 0 bottom
TP57  [PAD.03X.05]  90.17,56.77 0 bottom
TP58  [PAD.03X.05]  90.93,58.93 0 bottom
TP59  TEST-POINT3X5  [PAD.03X.05]  83.82,61.72 0 bottom
TP60  TEST-POINT3X5  [PAD.03X.05]  90.3,61.21 0 bottom
TP61  TEST-POINT3X5  [PAD.03X.05]  112.27,58.42 0 bottom
TP62  TEST-POINT3X5  [PAD.03X.05]  109.98,59.82 0 bottom
TP63  [PAD.03X.05]  138.68,56.77 0 bottom
TP64  [PAD.03X.05]  139.45,58.93 0 bottom
TP65  TEST-POINT3X5  [PAD.03X.05]  132.33,61.72 0 bottom
TP66  TEST-POINT3X5  [PAD.03X.05]  138.81,61.21 0 bottom